# Altium PCB ASSD_TP1.PcbDoc
Units mm, origin at the board's own origin, x right, y up, seen from the top; angles counter-clockwise.
Board outline 100 x 100 mm, 6 copper layers (Top Layer, GND-TOP, VCC+, VCC-, GND-BOT, Bottom Layer), stack 1.231 mm thick; 115 components, 76 nets, 320 pads, 61 vias.
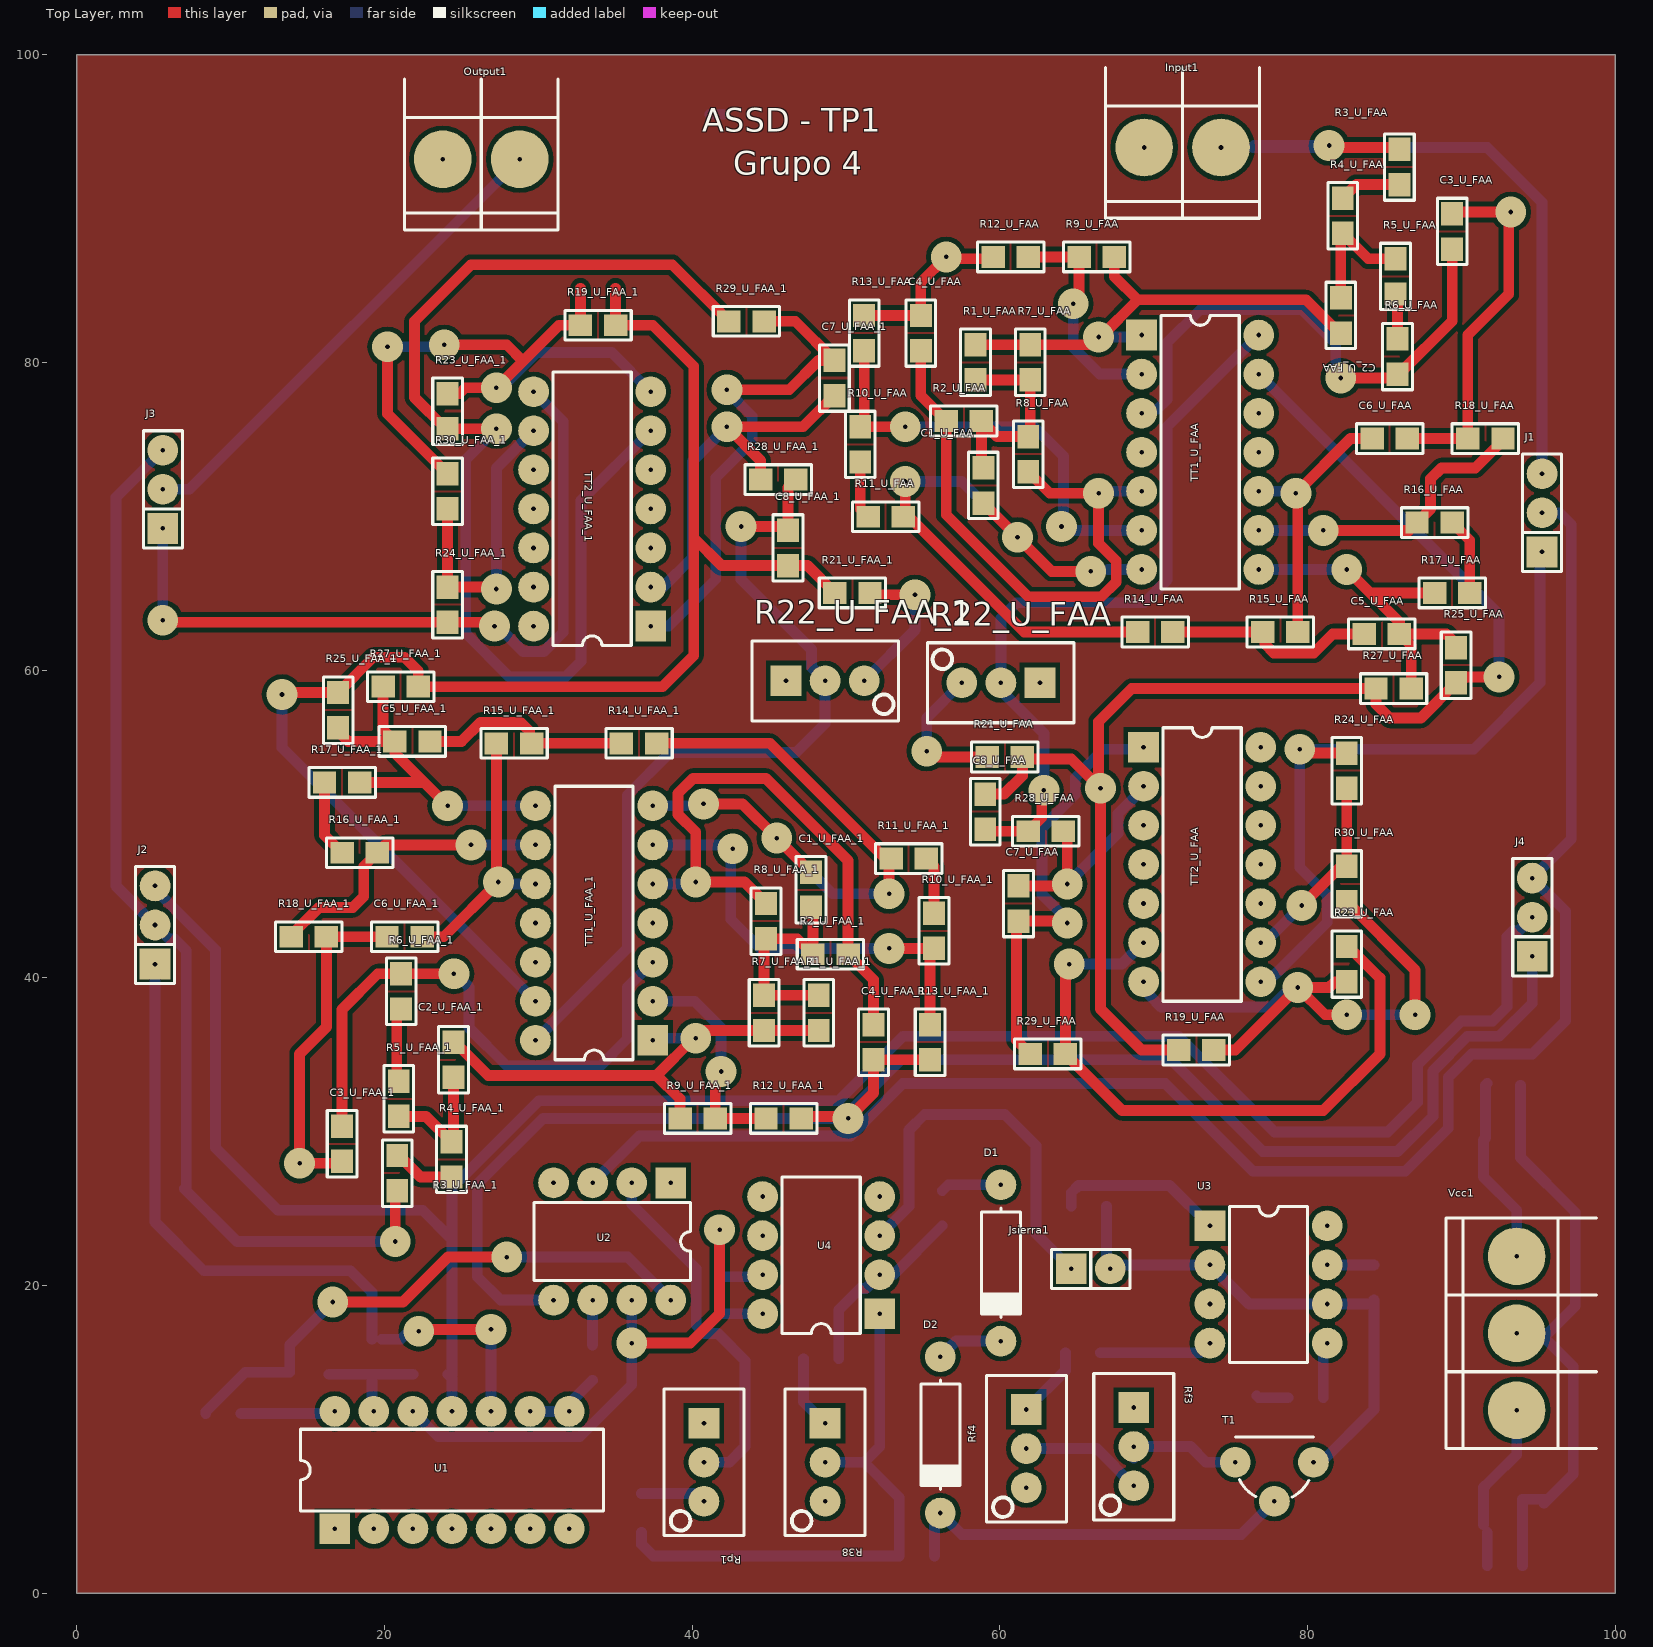
[diagram p0: Top Layer view]
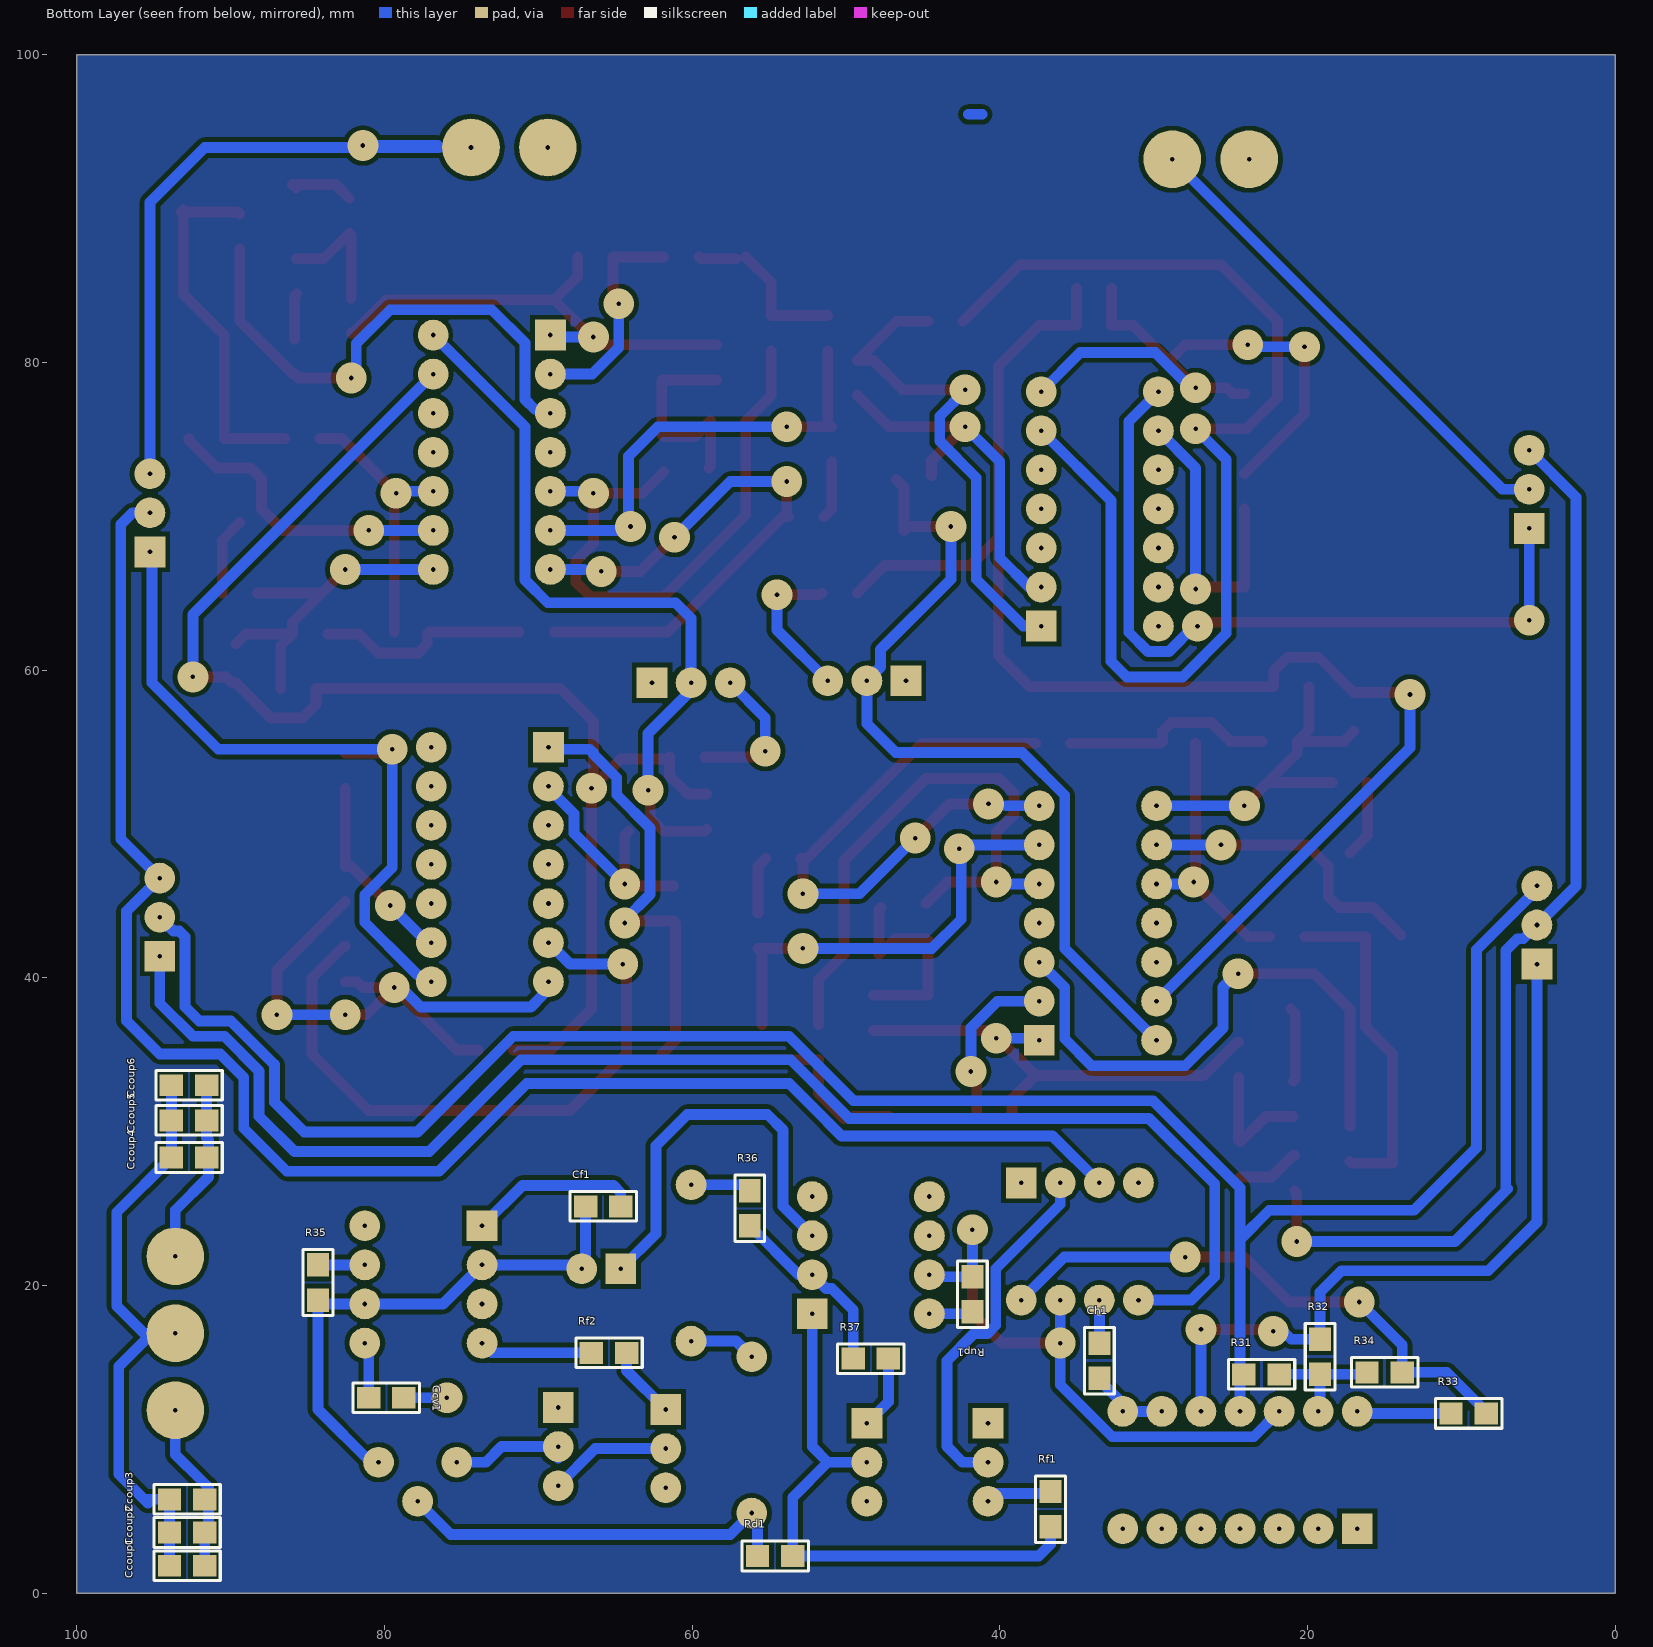
[diagram p1: Bottom Layer view, seen from below]
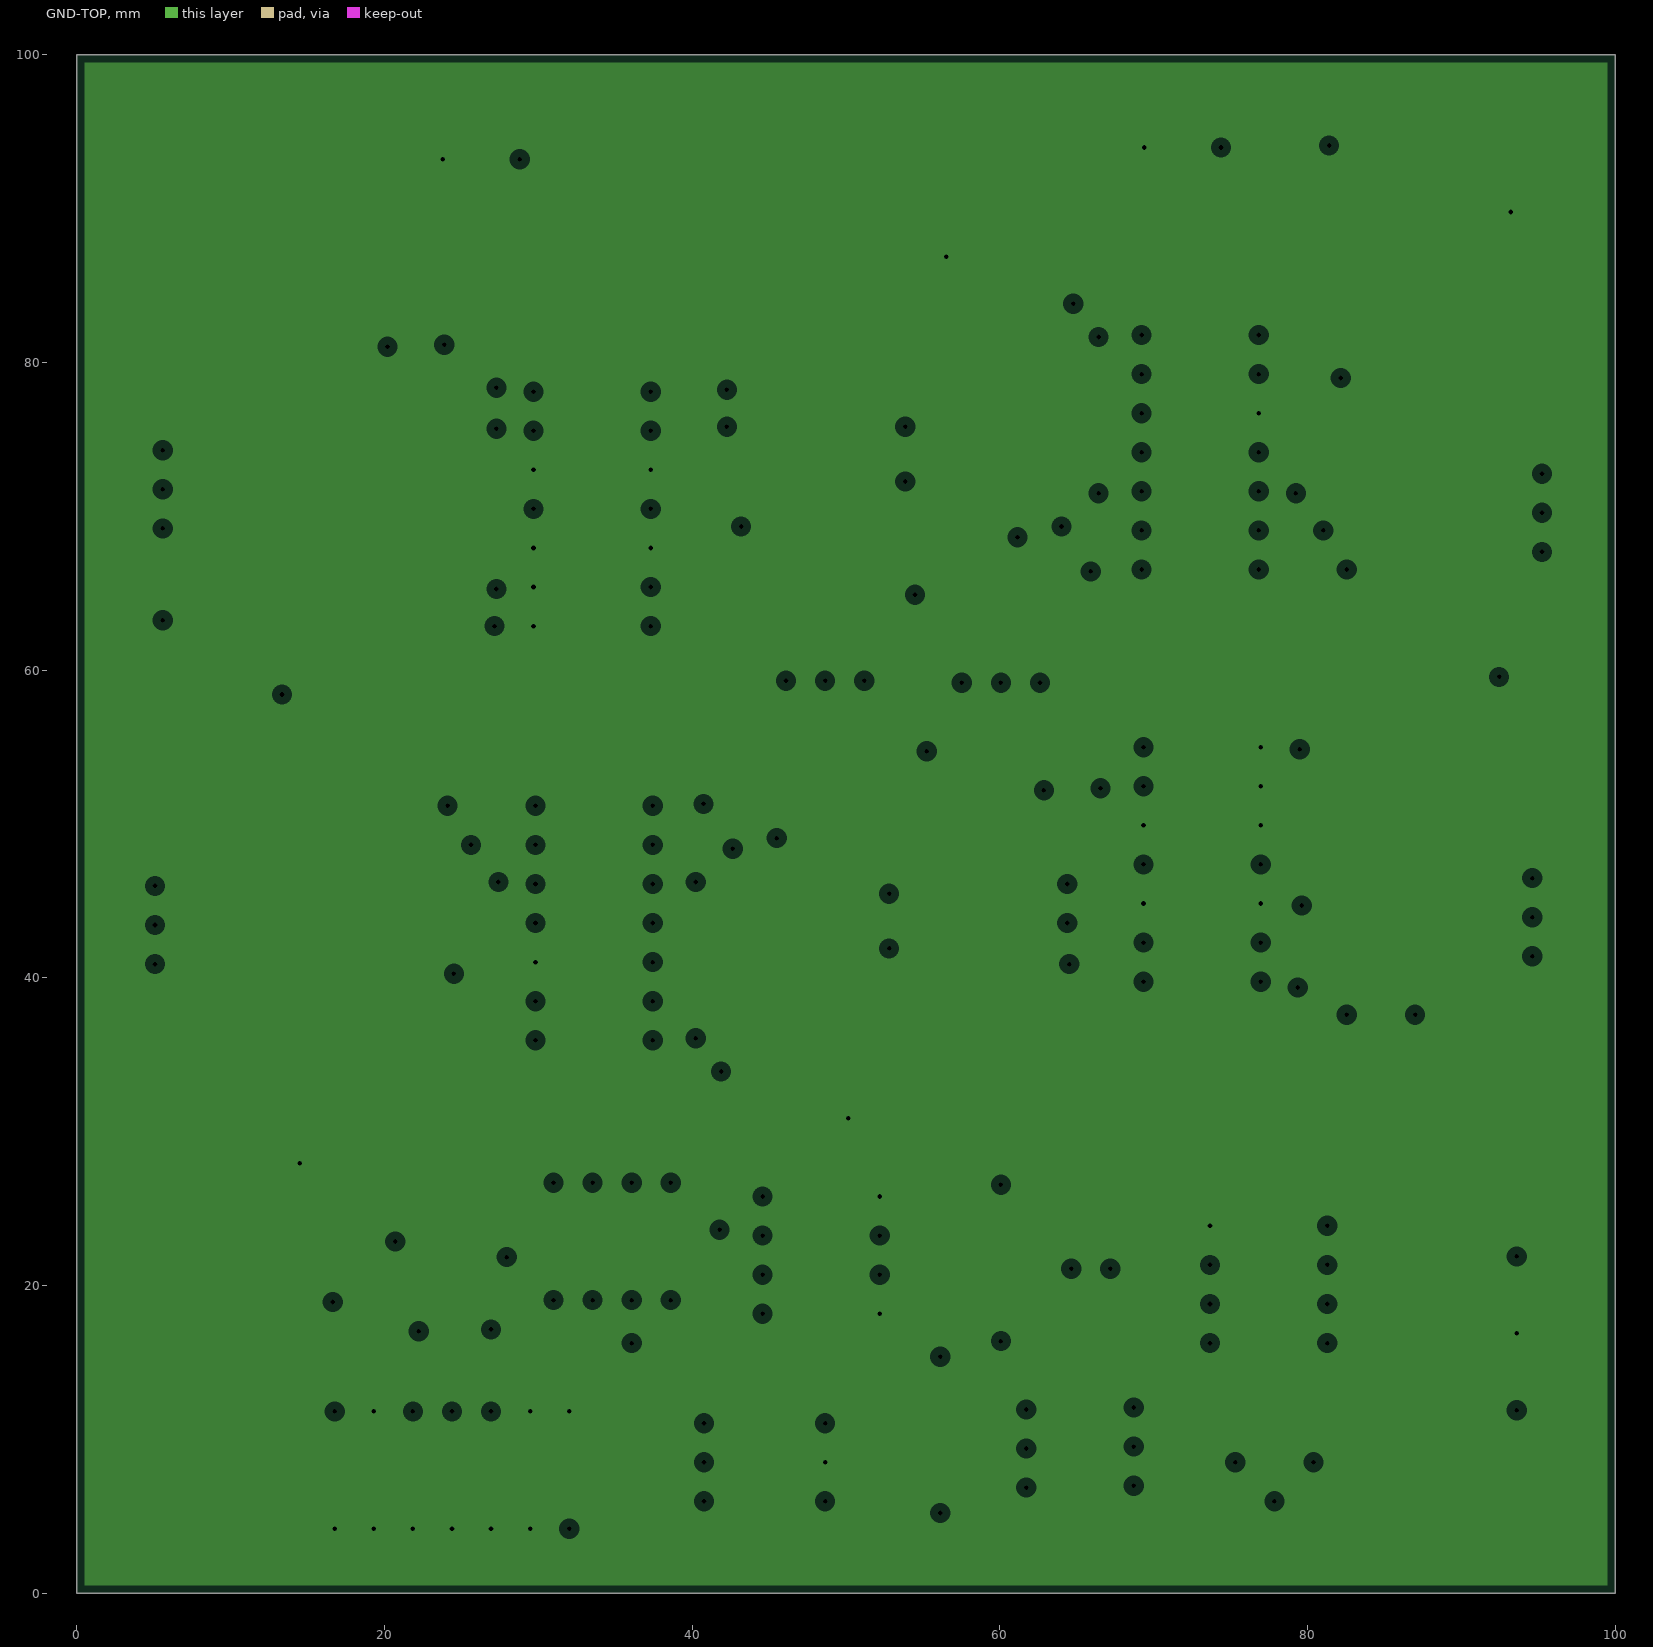
[diagram p2: GND-TOP, clearances drawn from the general rule]
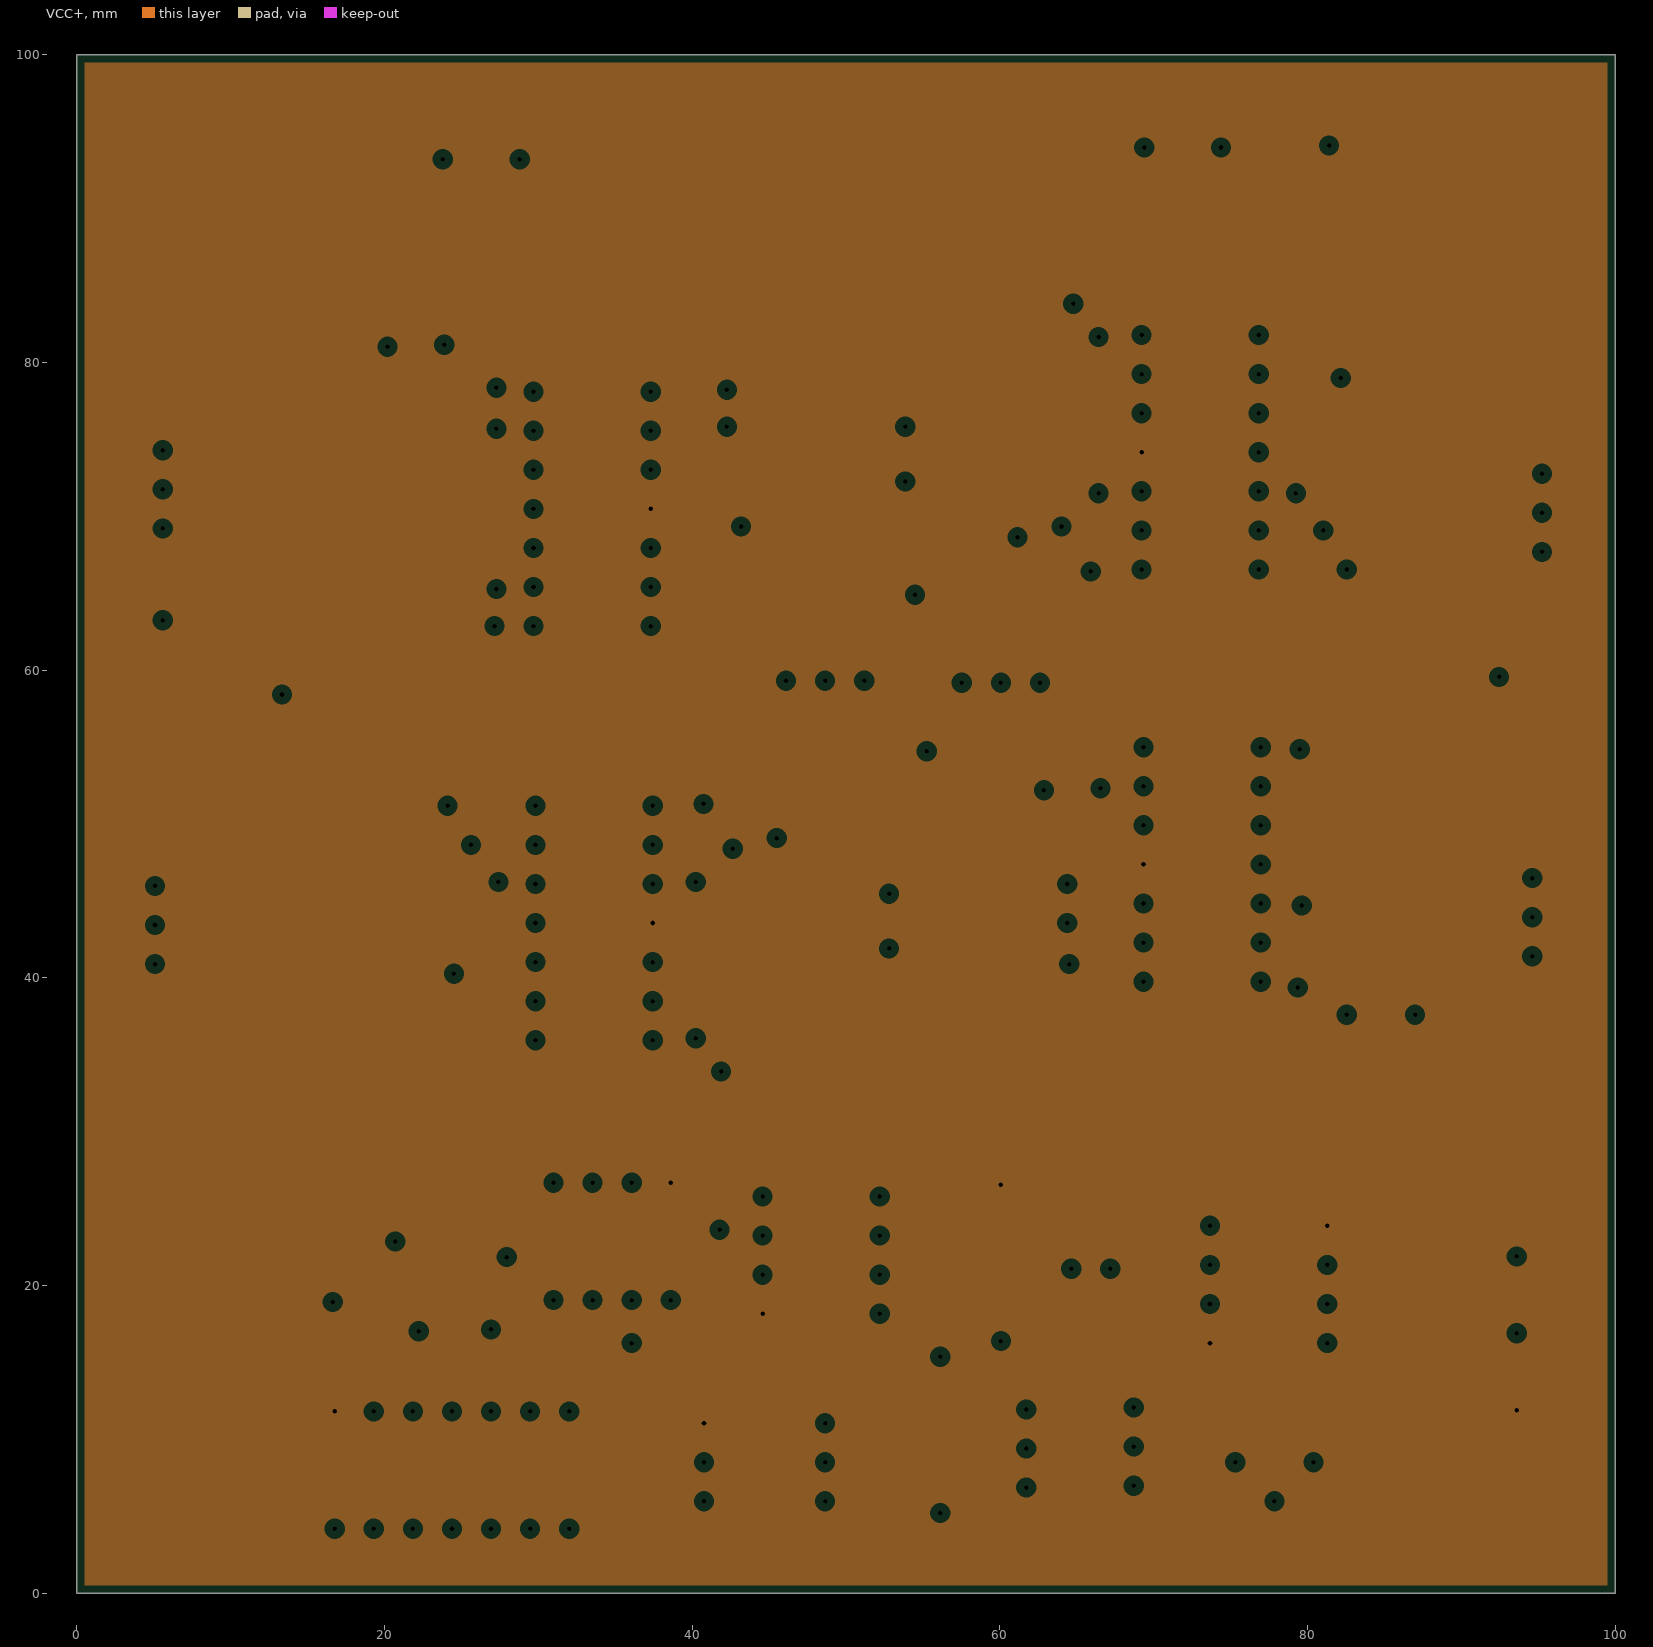
[diagram p3: VCC+, clearances drawn from the general rule]
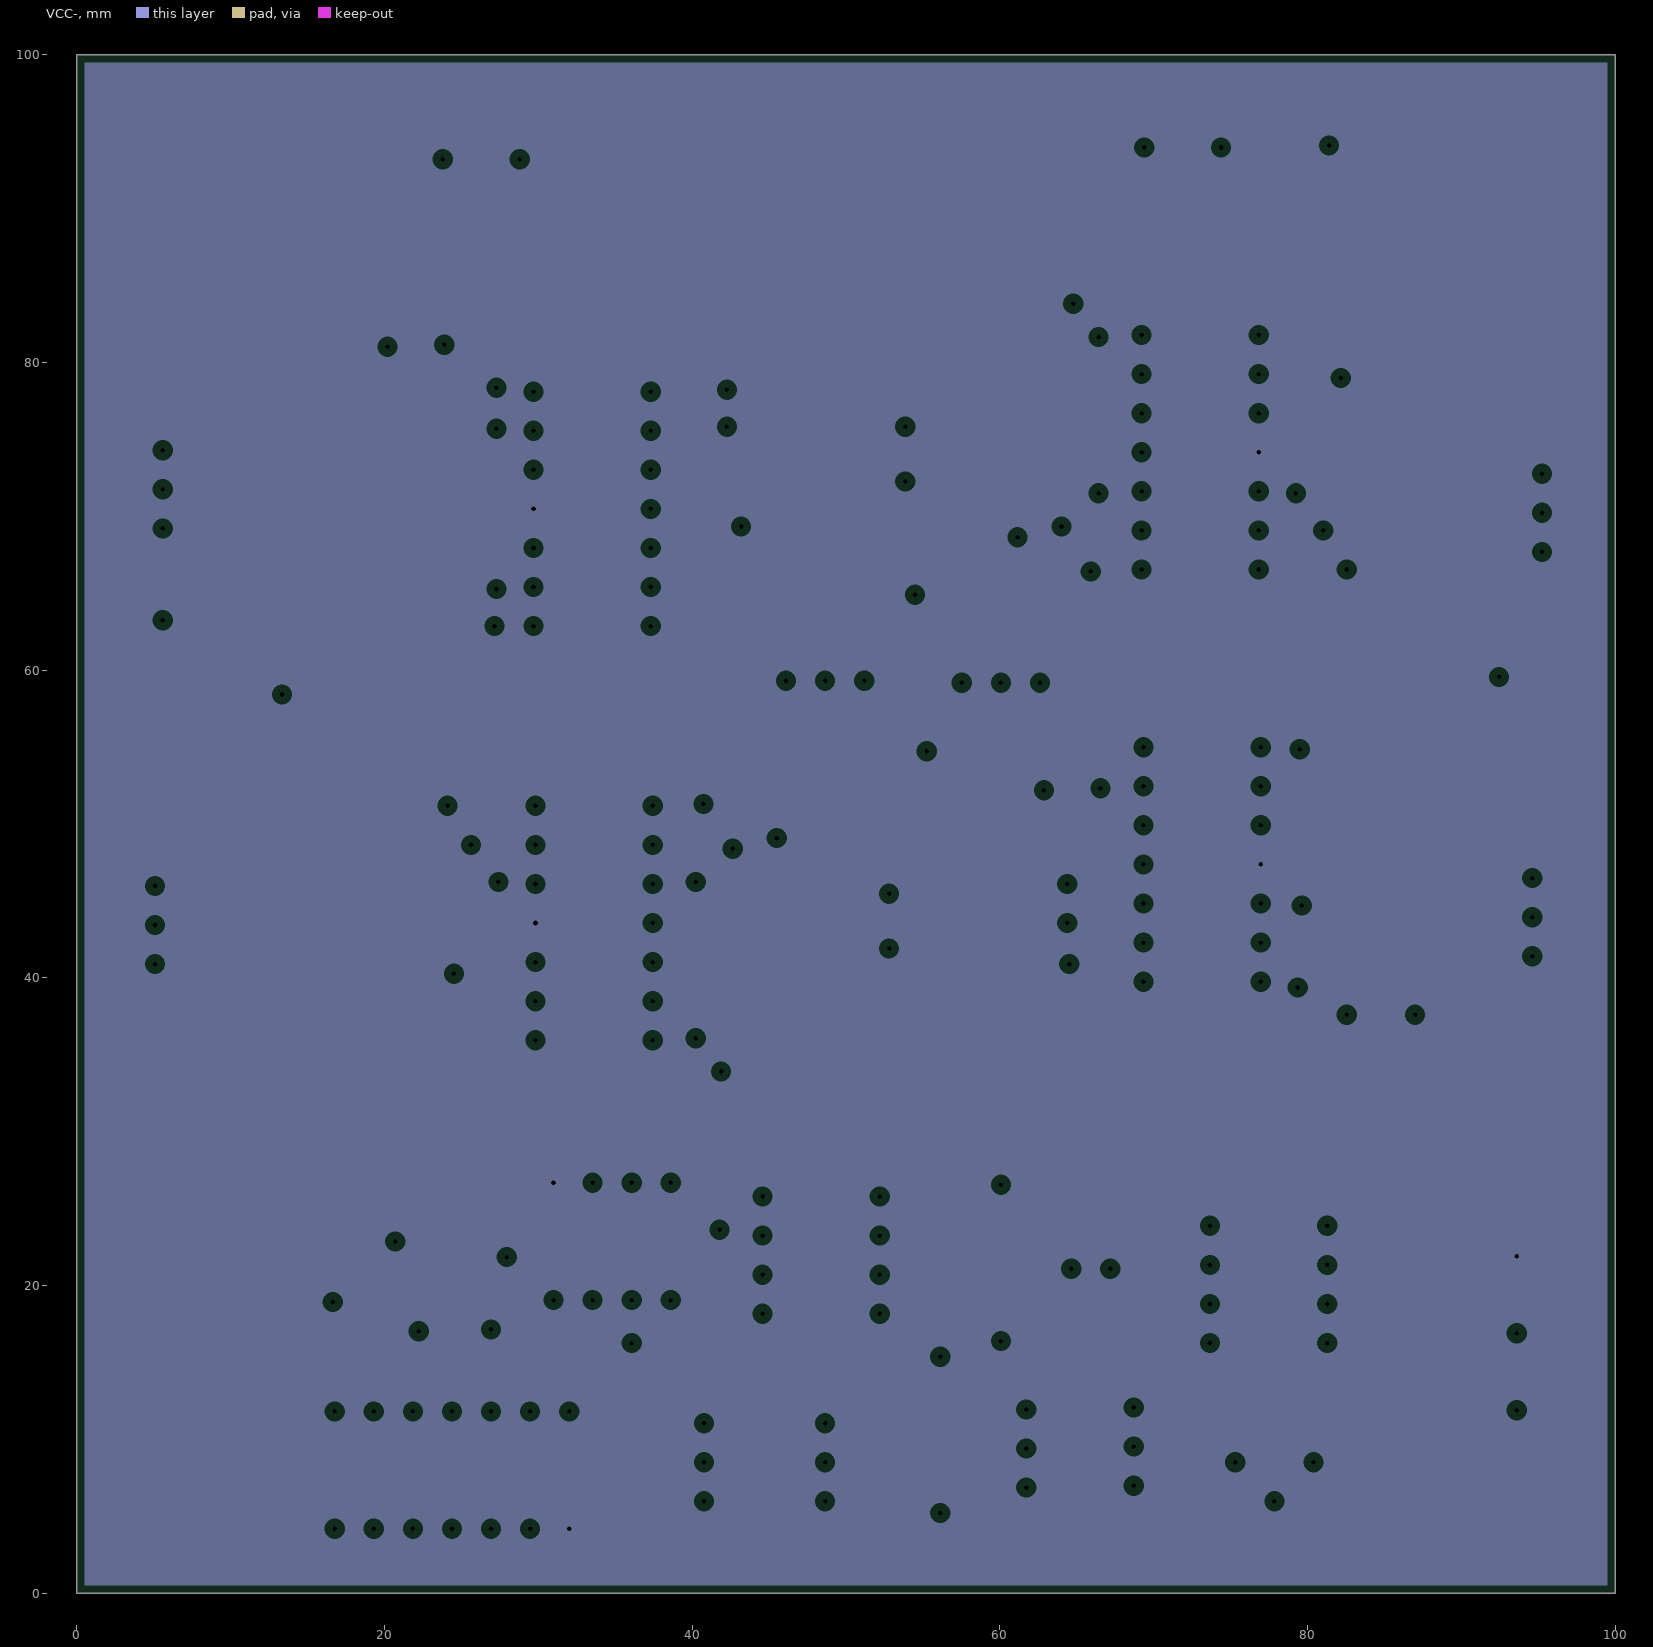
[diagram p4: VCC-, clearances drawn from the general rule]
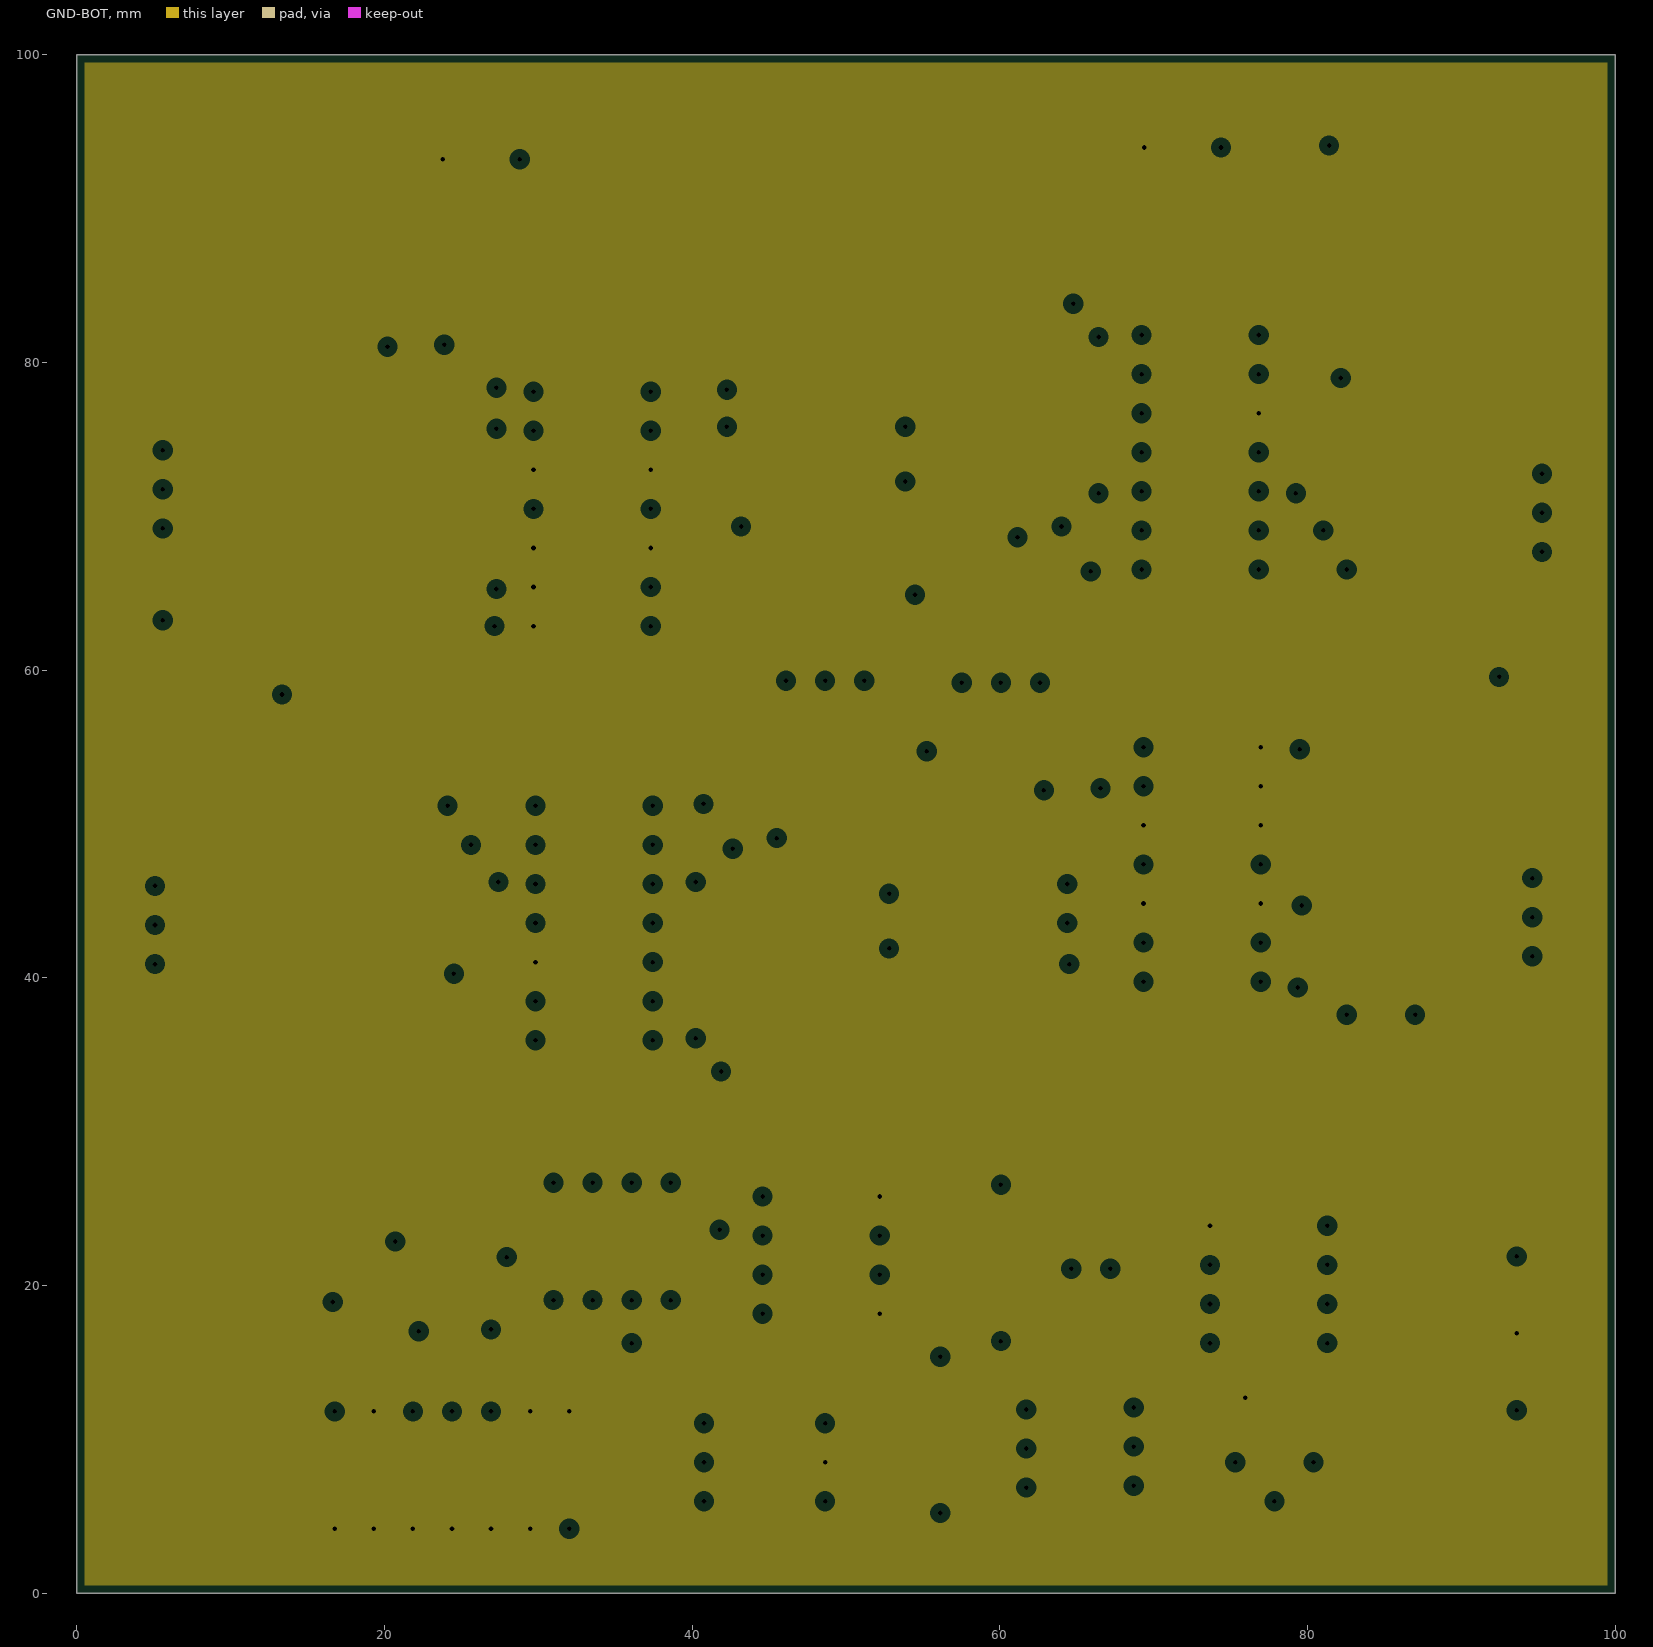
[diagram p5: GND-BOT, clearances drawn from the general rule]
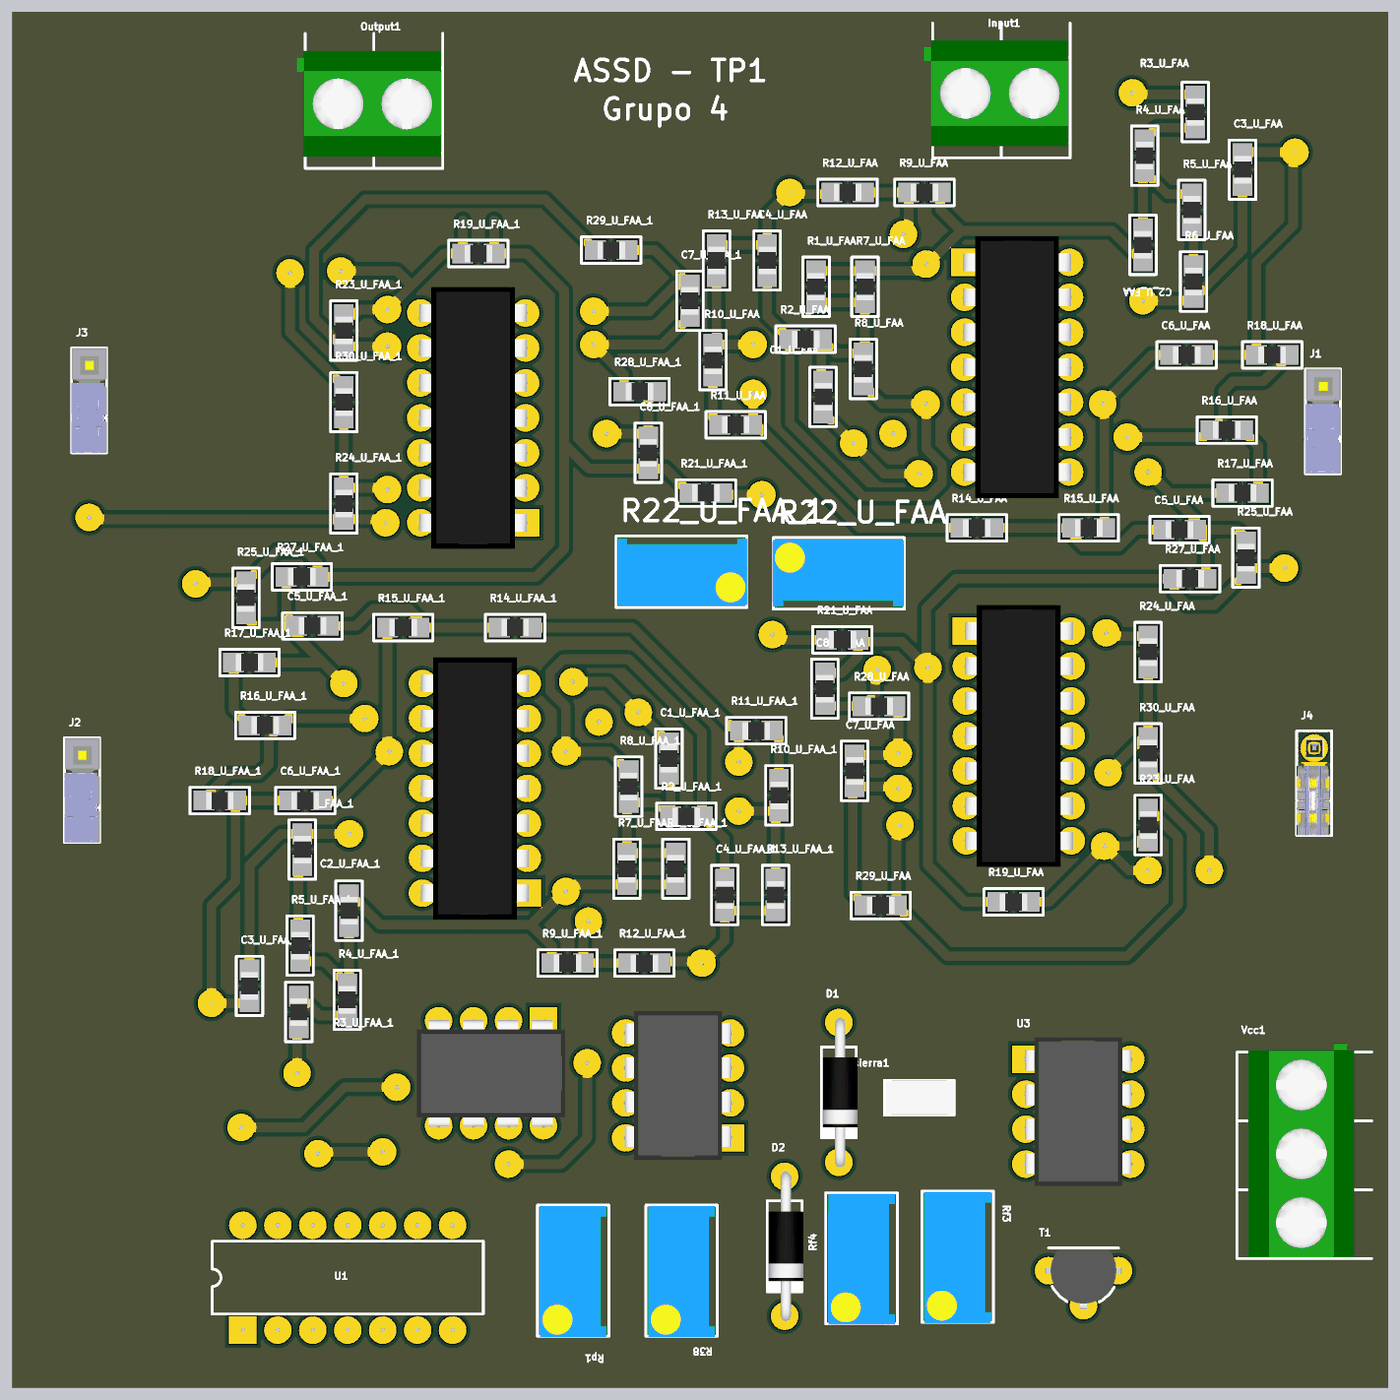
[diagram p6: 3D render of the assembled board from above, using the file's embedded part models]
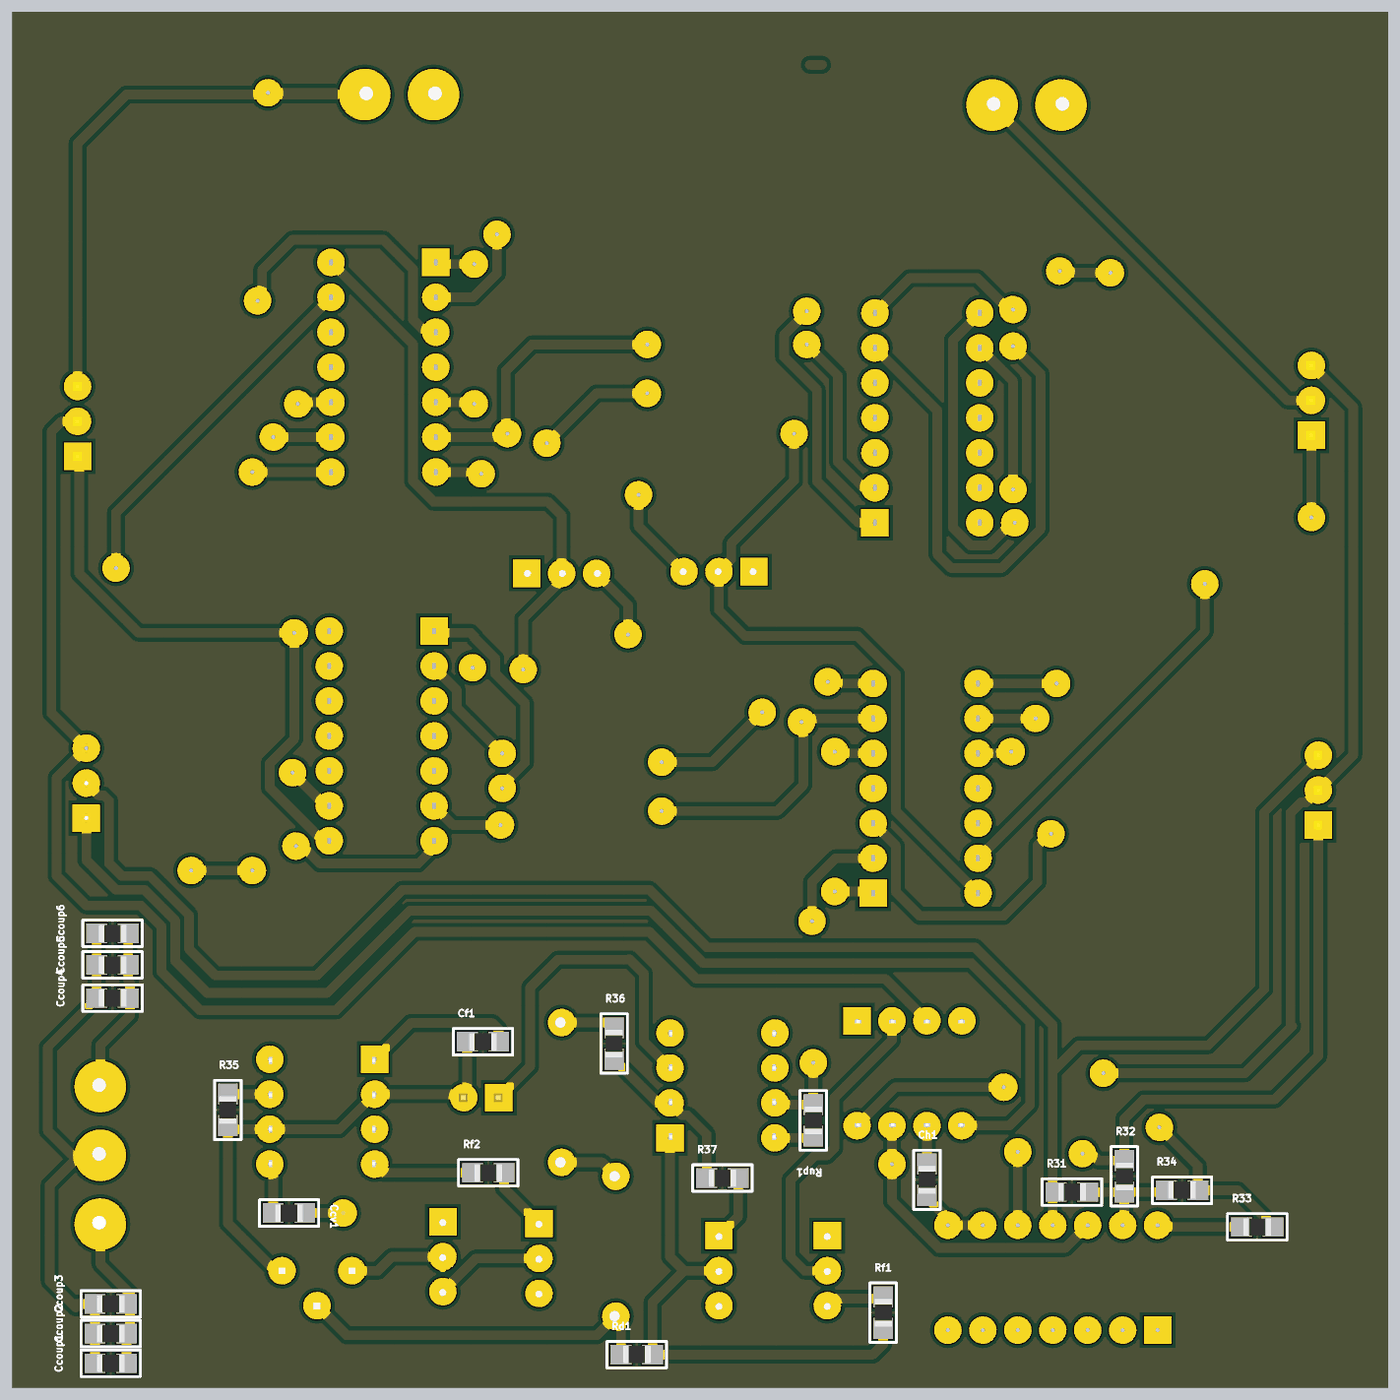
[diagram p7: 3D render of the assembled board from below, using the file's embedded part models]

## Layer stack, top to bottom
Top Solder: solder mask 0.0102, Solder Resist, Dk 3.5
Top Layer: signal copper 0.0356
Dielectric 1: core 0.254, FR-4, Dk 4.2
GND-TOP: plane copper 0.036, net GND
Dielectric 3: prepreg 0.127, Dk 4.2
VCC+: plane copper 0.036, net Vcc+_U_FAA
Dielectric 4: core 0.254, Dk 4.2
VCC-: plane copper 0.036, net Vcc-_U_FAA
Dielectric 5: prepreg 0.127, Dk 4.2
GND-BOT: plane copper 0.036, net GND
Dielectric 2: core 0.254, Dk 4.2
Bottom Layer: signal copper 0.0356
Bottom Solder: solder mask 0.0102, Solder Resist, Dk 3.5

## Board outline
0,0 100,0 100,100 0,100

## Design rules (kind name [scope] priority, off if disabled: settings)
Clearance [All] p1: gap=0.3 ignorepadtopadclearanceinfootprint=FALSE
PlaneClearance [All] p1: clearance=0.508
PlaneConnect [All] p1: pad.planeconnectstyle=Relief pad.reliefexpansion=0.508 pad.reliefentries=4 pad.reliefconductorwidth=0.254 pad.reliefairgap=0.254 via.planeconnectstyle=Direct via.reliefexpansion=0.508 via.reliefentries=4 via.reliefconductorwidth=0.254 via.reliefairgap=0.254
PolygonConnect [All] p1: connectstyle=Relief reliefconductorwidth=0.254 reliefentries=4 polygonreliefangle="90 Angle" airgapwidth=0.254
RoutingVias [All] p1: holewidth=0.3 width=2 viastyle="Through Hole" minholewidth=0.3 minwidth=1.5 maxholewidth=0.5 maxwidth=3
SolderMaskExpansion [All] p1: expansion=0.102
Width [All] p1: maxlimit=0.9 minlimit=0.6 preferedwidth=0.7
28 further rules are at their usual default settings.

## Classes and differential pairs
channel class LP: U_FAA U_FAA_1
component class U_S&H: Ch1 R33 R34 Rf1 Rp1 U2
component class U_Osc: Ccv1 Cf1 D1 D2 Jsierra1 R35 R36 R37 R38 Rd1 Rf2 Rf3 Rf4 Rup1 T1 U3 U4
component class U_FAA_1: C1_U_FAA_1 C2_U_FAA_1 C3_U_FAA_1 C4_U_FAA_1 C5_U_FAA_1 C6_U_FAA_1 C7_U_FAA_1 C8_U_FAA_1 R1_U_FAA_1 R2_U_FAA_1 R3_U_FAA_1 R4_U_FAA_1 R5_U_FAA_1 R6_U_FAA_1 R7_U_FAA_1 R8_U_FAA_1 R9_U_FAA_1 R10_U_FAA_1 R11_U_FAA_1 R12_U_FAA_1 R13_U_FAA_1 R14_U_FAA_1 R15_U_FAA_1 R16_U_FAA_1 R17_U_FAA_1 R18_U_FAA_1 R19_U_FAA_1 R21_U_FAA_1 R22_U_FAA_1 R23_U_FAA_1 R24_U_FAA_1 R25_U_FAA_1 R27_U_FAA_1 R28_U_FAA_1 R29_U_FAA_1 R30_U_FAA_1 TT1_U_FAA_1 TT2_U_FAA_1
component class U_FAA: C1_U_FAA C2_U_FAA C3_U_FAA C4_U_FAA C5_U_FAA C6_U_FAA C7_U_FAA C8_U_FAA R1_U_FAA R2_U_FAA R3_U_FAA R4_U_FAA R5_U_FAA R6_U_FAA R7_U_FAA R8_U_FAA R9_U_FAA R10_U_FAA R11_U_FAA R12_U_FAA R13_U_FAA R14_U_FAA R15_U_FAA R16_U_FAA R17_U_FAA R18_U_FAA R19_U_FAA R21_U_FAA R22_U_FAA R23_U_FAA R24_U_FAA R25_U_FAA R27_U_FAA R28_U_FAA R29_U_FAA R30_U_FAA TT1_U_FAA TT2_U_FAA
component class U_ASwitch: R31 R32 U1
component class AllInOne: Ccoup1 Ccoup2 Ccoup3 Ccoup4 Ccoup5 Ccoup6 Input1 J1 J2 J3 J4 Output1 Vcc1

## Components (designator, comment, footprint, x,y, rotation, side; value= is the part's Value field where it differs from the comment)
C1_U_FAA "CAP" 0805 58.928,72.009 r270 top (schematic designator C1)
C1_U_FAA_1 "CAP" 0805 47.721,45.72 r90 top (schematic designator C1)
C2_U_FAA "CAP" 0805 82.169,83.058 r270 top (schematic designator C2)
C2_U_FAA_1 "CAP" 0805 24.48,34.671 r90 top (schematic designator C2)
C3_U_FAA "CAP" 0805 89.408,88.519 r270 top (schematic designator C3)
C3_U_FAA_1 "CAP" 0805 17.241,29.21 r90 top (schematic designator C3)
C4_U_FAA "CAP" 0805 54.864,81.915 r270 top (schematic designator C4)
C4_U_FAA_1 "CAP" 0805 51.785,35.814 r90 top (schematic designator C4)
C5_U_FAA "CAP" 0805 84.836,62.357 r0 top (schematic designator C5)
C5_U_FAA_1 "CAP" 0805 21.813,55.372 r180 top (schematic designator C5)
C6_U_FAA "CAP" 0805 85.344,75.057 r180 top (schematic designator C6)
C6_U_FAA_1 "CAP" 0805 21.305,42.672 r0 top (schematic designator C6)
C7_U_FAA "CAP" 0805 61.214,44.831 r270 top (schematic designator C7)
C7_U_FAA_1 "CAP" 0805 49.245,78.994 r90 top (schematic designator C7)
C8_U_FAA "CAP" 0805 59.055,50.8 r270 top (schematic designator C8)
C8_U_FAA_1 "CAP" 0805 46.228,67.945 r90 top (schematic designator C8)
Ccoup1 "CAP" 0805 92.837,1.778 r0 bottom
Ccoup2 "CAP" 0805 92.837,3.937 r0 bottom
Ccoup3 "CAP" 0805 92.837,6.096 r0 bottom
Ccoup4 "CAP" 0805 92.71,28.321 r0 bottom
Ccoup5 "CAP" 0805 92.71,30.734 r0 bottom
Ccoup6 "CAP" 0805 92.71,33.02 r0 bottom
Ccv1 "CAP" 0805 79.883,12.7 r180 bottom
Cf1 "CAP" 0805 65.786,25.146 r180 bottom
Ch1 "CAP" 0805 33.528,15.113 r270 bottom
D1 "DIODO SCHOTTKY" DO41 60.071,21.463 r270 top
D2 "DIODO SCHOTTKY" DO41 56.134,10.287 r270 top
Input1 "BORNERA 2" BORNERA2 71.882,93.98 r90 top
J1 "JUMPER" JUMPER3 95.25,70.231 r90 top
J2 "JUMPER" JUMPER3 5.08,43.434 r90 top
J3 "JUMPER" JUMPER3 5.588,71.755 r90 top
J4 "JUMPER" JUMPER3 94.615,43.942 r90 top
Jsierra1 "JUMPER" JUMPER2 65.913,21.082 r0 top
Output1 "BORNERA 2" BORNERA2 26.289,93.218 r90 top
R1_U_FAA "RES" 0805 58.42,80.01 r270 top (schematic designator R1)
R1_U_FAA_1 "RES" 0805 48.229,37.719 r90 top (schematic designator R1)
R2_U_FAA "RES" 0805 57.658,76.2 r180 top (schematic designator R2)
R2_U_FAA_1 "RES" 0805 48.991,41.529 r0 top (schematic designator R2)
R3_U_FAA "RES" 0805 85.979,92.71 r270 top (schematic designator R3)
R3_U_FAA_1 "RES" 0805 20.828,27.305 r90 top (schematic designator R3)
R4_U_FAA "RES" 0805 82.296,89.535 r270 top (schematic designator R4)
R4_U_FAA_1 "RES" 0805 24.353,28.194 r90 top (schematic designator R4)
R5_U_FAA "RES" 0805 85.725,85.598 r270 top (schematic designator R5)
R5_U_FAA_1 "RES" 0805 20.924,32.131 r90 top (schematic designator R5)
R6_U_FAA "RES" 0805 85.852,80.391 r270 top (schematic designator R6)
R6_U_FAA_1 "RES" 0805 21.082,39.116 r90 top (schematic designator R6)
R7_U_FAA "RES" 0805 61.976,80.01 r270 top (schematic designator R7)
R7_U_FAA_1 "RES" 0805 44.673,37.719 r90 top (schematic designator R7)
R8_U_FAA "RES" 0805 61.849,74.041 r270 top (schematic designator R8)
R8_U_FAA_1 "RES" 0805 44.8,43.688 r90 top (schematic designator R8)
R9_U_FAA "RES" 0805 66.294,86.868 r180 top (schematic designator R9)
R9_U_FAA_1 "RES" 0805 40.355,30.861 r0 top (schematic designator R9)
R10_U_FAA "RES" 0805 50.927,74.676 r90 top (schematic designator R10)
R10_U_FAA_1 "RES" 0805 55.722,43.053 r270 top (schematic designator R10)
R11_U_FAA "RES" 0805 52.578,69.977 r0 top (schematic designator R11)
R11_U_FAA_1 "RES" 0805 54.071,47.752 r180 top (schematic designator R11)
R12_U_FAA "RES" 0805 60.706,86.868 r0 top (schematic designator R12)
R12_U_FAA_1 "RES" 0805 45.943,30.861 r180 top (schematic designator R12)
R13_U_FAA "RES" 0805 51.181,81.915 r270 top (schematic designator R13)
R13_U_FAA_1 "RES" 0805 55.468,35.814 r90 top (schematic designator R13)
R14_U_FAA "RES" 0805 70.104,62.484 r0 top (schematic designator R14)
R14_U_FAA_1 "RES" 0805 36.545,55.245 r180 top (schematic designator R14)
R15_U_FAA "RES" 0805 78.232,62.484 r0 top (schematic designator R15)
R15_U_FAA_1 "RES" 0805 28.417,55.245 r180 top (schematic designator R15)
R16_U_FAA "RES" 0805 88.265,69.596 r180 top (schematic designator R16)
R16_U_FAA_1 "RES" 0805 18.384,48.133 r0 top (schematic designator R16)
R17_U_FAA "RES" 0805 89.408,65.024 r0 top (schematic designator R17)
R17_U_FAA_1 "RES" 0805 17.241,52.705 r180 top (schematic designator R17)
R18_U_FAA "RES" 0805 91.567,75.057 r0 top (schematic designator R18)
R18_U_FAA_1 "RES" 0805 15.082,42.672 r180 top (schematic designator R18)
R19_U_FAA "RES" 0805 72.771,35.306 r0 top (schematic designator R19)
R19_U_FAA_1 "RES" 0805 33.878,82.423 r180 top (schematic designator R19)
R21_U_FAA "RES" 0805 60.325,54.356 r180 top (schematic designator R21)
R21_U_FAA_1 "RES" 0805 50.419,65.024 r0 top (schematic designator R21)
R22_U_FAA "PRESET" "PRESET V" 60.071,59.182 r180 top (schematic designator R22)
R22_U_FAA_1 "PRESET" "PRESET V" 48.641,59.309 r0 top (schematic designator R22)
R23_U_FAA "RES" 0805 82.55,40.894 r270 top (schematic designator R23)
R23_U_FAA_1 "RES" 0805 24.099,76.835 r90 top (schematic designator R23)
R24_U_FAA "RES" 0805 82.55,53.467 r90 top (schematic designator R24)
R24_U_FAA_1 "RES" 0805 24.099,64.262 r270 top (schematic designator R24)
R25_U_FAA "RES" 0805 89.662,60.325 r270 top (schematic designator R25)
R25_U_FAA_1 "RES" 0805 16.987,57.404 r90 top (schematic designator R25)
R27_U_FAA "RES" 0805 85.598,58.801 r180 top (schematic designator R27)
R27_U_FAA_1 "RES" 0805 21.051,58.928 r0 top (schematic designator R27)
R28_U_FAA "RES" 0805 62.992,49.53 r0 top (schematic designator R28)
R28_U_FAA_1 "RES" 0805 45.593,72.39 r180 top (schematic designator R28)
R29_U_FAA "RES" 0805 63.119,35.052 r0 top (schematic designator R29)
R29_U_FAA_1 "RES" 0805 43.53,82.677 r180 top (schematic designator R29)
R30_U_FAA "RES" 0805 82.55,46.101 r90 top (schematic designator R30)
R30_U_FAA_1 "RES" 0805 24.099,71.628 r270 top (schematic designator R30)
R31 "RES" 0805 22.987,14.224 r0 bottom
R32 "RES" 0805 19.177,15.367 r90 bottom
R33 "RES" 0805 9.525,11.684 r0 bottom
R34 "RES" 0805 14.986,14.351 r180 bottom
R35 "RES" 0805 84.328,20.193 r90 bottom
R36 "RES" 0805 56.261,25.019 r90 bottom
R37 "RES" 0805 48.387,15.24 r180 bottom
R38 "PRESET" "PRESET V" 48.641,8.509 r270 top
Rd1 "RES" 0805 54.61,2.413 r0 bottom
Rf1 "RES" 0805 36.703,5.461 r90 bottom
Rf2 "RES" 0805 65.405,15.621 r0 bottom
Rf3 "PRESET" "PRESET V" 68.707,9.525 r270 top
Rf4 "PRESET" "PRESET V" 61.722,9.398 r270 top
Rp1 "PRESET" "PRESET V" 40.767,8.509 r270 top
Rup1 "RES" 0805 41.783,19.431 r270 bottom
T1 "TRANSISTOR PNP" TO92 77.851,7.239 r0 top
TT1_U_FAA "TL084ACN" DIP14 69.215,81.788 r0 top (schematic designator TT1)
TT1_U_FAA_1 "TL084ACN" DIP14 37.434,35.941 r180 top (schematic designator TT1)
TT2_U_FAA "TL084ACN" DIP14 69.342,54.991 r0 top (schematic designator TT2)
TT2_U_FAA_1 "TL084ACN" DIP14 37.307,62.865 r180 top (schematic designator TT2)
U1 "TLC4066IN" N014 24.384,8.001 r0 top
U2 "LF398" DIP8 38.608,26.67 r270 top
U3 "LM555" DIP8 73.66,23.876 r0 top
U4 "LM311" DIP8 52.197,18.161 r180 top
Vcc1 "BORNERA 3" BORNERA3 93.599,16.891 r0 top

## Footprints (in the part's own frame and the unit in brackets; to place one, negate y for a bottom-side part, rotate by r counter-clockwise, add the part's x,y. Pads: shape width x height; smd on the part's side, far side on the other; paste and mask are expansions set on the pad)
0805 [mil] "Pasivo 0805"
  rect 60x56 smd: 1(-45,0) 2(45,0)
  silkscreen extent -85,-38 85,38, body extent -40,-25 39,25, height 15
BORNERA2 [mm] "Bornera con Tornillos 5mm separación"
  round 3.75 hole 0.3: 1(0,2.5) 2(0,-2.5)
  silkscreen extent -4.6,-5 5.2,5, body extent -3.76,-4.89 3.94,5.61, height 10
BORNERA3 [mm] "Bornera con Tornillos 5mm separación"
  round 3.75 hole 0.3: 1(0,5) 2(0,0) 3(0,-5)
  silkscreen extent -4.6,-7.5 5.2,7.5, body extent -3.76,-7.39 3.94,8.11, height 10.05
DIP8 [mm]
  rect 2x2 hole 0.3: 1(0,0)
  round 2 hole 0.3: 2(0,-2.54) 3(0,-5.08) 4(0,-7.62) 5(7.62,-7.62) 6(7.62,-5.08) 7(7.62,-2.54) 8(7.62,0)
  silkscreen extent 1.27,-8.89 6.35,1.27, body extent -0.06,-9.21 7.7,1.59, height 4.5
DIP14 [mm]
  rect 2x2 hole 0.3: 1(0,0)
  round 2 hole 0.3: 2(0,-2.54) 3(0,-5.08) 4(0,-7.62) 5(0,-10.16) 6(0,-12.7) 7(0,-15.24) 8(7.62,-15.24) 9(7.62,-12.7) 10(7.62,-10.16) 11(7.62,-7.62) 12(7.62,-5.08) 13(7.62,-2.54) 14(7.62,0)
  silkscreen extent 1.27,-16.51 6.35,1.27, body extent -0.13,-17.14 7.75,1.9, height 4.19
DO41 [mm]
  round 2 hole 0.3: 1(-5.08,0) 2(5.08,0)
  silkscreen extent -3.56,-1.27 3.56,1.27, body extent -5.46,-1.19 5.46,1.37, height 2.03
JUMPER2 [mm]
  rect 2x2 hole 0.3: 1(-1.27,0)
  round 2 hole 0.3: 2(1.27,0)
  silkscreen extent -2.54,-1.27 2.54,1.27, body extent -2.46,-1.27 2.54,1.27, height 9.5
JUMPER3 [mm]
  rect 2x2 hole 0.3: 1(-2.54,0)
  round 2 hole 0.3: 2(0,0) 3(2.54,0)
  silkscreen extent -3.81,-1.27 3.81,1.27, body extent -3.81,-1.3 3.81,1.27, height 16.15
N014 [mm] "DIP; 14 Leads; Row Spacing 7.62 mm; Pitch 2.54 mm"
  rect 2x2 hole 0.3: 1(-7.62,-3.81)
  round 2 hole 0.3: 2(-5.08,-3.81) 3(-2.54,-3.81) 4(0,-3.81) 5(2.54,-3.81) 6(5.08,-3.81) 7(7.62,-3.81) 8(7.62,3.81) 9(5.08,3.81) 10(2.54,3.81) 11(0,3.81) 12(-2.54,3.81) 13(-5.08,3.81) 14(-7.62,3.81)
  silkscreen extent -9.85,-2.65 9.85,2.65, body extent -9.59,-3.3 9.59,3.3, height 5.08
"PRESET V" [mm]
  rect 2x2 hole 0.3: 1(-2.54,0)
  round 2 hole 0.3: 2(0,0) 3(2.54,0)
  silkscreen extent -4.76,-2.6 4.76,2.6, body extent -4.7,-2.42 4.83,2.42, height 11.55
TO92 [mm]
  round 2 hole 0.3: 1(0,-1.27) 2(2.54,1.27) 3(-2.54,1.27)
  silkscreen extent -2.54,-1 2.54,2.92, body extent -2.79,-1.55 2.79,2.79, height 8

## Part data
J1 J2 J3 J4: library part JUMPER3
TT1_U_FAA TT1_U_FAA_1 TT2_U_FAA TT2_U_FAA_1: "General-Purpose J-FET Quad Operational Amplifier", ComponentLink1Description="Manufacturer Link", ComponentLink1URL=http://www.st.com/, ComponentLink2Description=Datasheet, ComponentLink2URL=http://www.st.com/stonline/products/literature/ds/2301/tl084.pdf, DatasheetVersion=Jan-1999, LatestRevisionDate=06-Jun-2005, LatestRevisionNote="Stylized 3D Model Added.", PackageDescription="DIP; 14 Leads; Row Spacing 7.62 mm; Pitch 2.54 mm", PackageReference=DIP14, PackageVersion=Jan-1997, Published=24-Aug-2001, Publisher="Altium Limited"
U1: "Quadruple Bilateral Analog Switch", ComponentLink1Description="Manufacturer Link", ComponentLink1URL=http://www.ti.com/, DatasheetVersion=Jan-1986, LatestRevisionDate=04-Mar-2005, LatestRevisionNote="Stylized 3D Model Added.", PackageDescription="DIP; 14 Leads; Row Spacing 7.62 mm; Pitch 2.54 mm", PackageReference=N014, PackageVersion=Oct-1995, Published=8-Jun-2000, Publisher="Altium Limited"
U2 U4: library part IC_DIP8
U3: "Timer"

## Via types
v1: diameter 2, hole 0.3, Top Layer to Bottom Layer, 56 vias
v2: diameter 2, hole 0.3, Top Layer to GND-TOP, 4 vias
v3: diameter 2, hole 0.3, GND-BOT to Bottom Layer, 1 vias

## Nets (pads, with @x,y where several pads share a name; then routed paths per layer and width w, separated by ;. In a path a pad name is that pad's centre, name@x,y a point inside that pad or via, vN(x,y) a via of type N, cw(c..) or ccw(c..) an arc to the next point about the centre after c; other vN are vias at no path point)
Clk1: Rup1.1 U1.12 U2.7 U4.7 | length 39.5
  Top Layer w0.7: v1(36.068,16.256) 39.878,16.256 41.783,18.161 v1(41.783,23.622)
  Bottom Layer w0.7: U1.12 23.495,10.16 32.686,10.16 36.068,13.542 v1(36.068,16.256) ; v1@36.068,16.51 U2.7 ; v1@41.783,23.749 v1(41.783,23.622) Rup1.1 44.45,20.574 U4.7
GND: C3_U_FAA.1 C3_U_FAA_1.1 C4_U_FAA.1 C4_U_FAA_1.1 C6_U_FAA.1 C6_U_FAA_1.1 Ccoup1.2 Ccoup2.2 Ccoup3.2 Ccoup4.2 Ccoup5.2 Ccoup6.2 Ccv1.2 Cf1.2 Ch1.2 Input1.1 Output1.1 R12_U_FAA.1 R12_U_FAA_1.1 R13_U_FAA.1 R13_U_FAA_1.1 R18_U_FAA.1 R18_U_FAA_1.1 R31.1 R32.1 R34.1 R38.2 Rd1.1 Rf1.1 TT1_U_FAA.12 TT1_U_FAA_1.12 TT2_U_FAA.3 TT2_U_FAA.5 TT2_U_FAA.10 TT2_U_FAA.12 TT2_U_FAA.13 TT2_U_FAA.14 TT2_U_FAA_1.3 TT2_U_FAA_1.5 TT2_U_FAA_1.10 TT2_U_FAA_1.12 TT2_U_FAA_1.13 TT2_U_FAA_1.14 U1.1 U1.2 U1.3 U1.4 U1.5 U1.6 U1.8 U1.9 U1.13 U3.1 U4.1 U4.4 Vcc1.2 | length 171.1
  Top Layer w0.7: C3_U_FAA_1.1 17.114,27.94 v2(14.478,27.94) 14.478,35.052 16.225,36.799 R18_U_FAA_1.1 C6_U_FAA_1.1 ; R12_U_FAA_1.1 47.213,30.988 v2@49.499,30.988 ; v2(50.134,30.861) 51.785,32.512 C4_U_FAA_1.1 R13_U_FAA_1.1 ; R13_U_FAA.1 C4_U_FAA.1 54.864,85.217 v2(56.515,86.868) ; v2@57.15,86.741 59.436,86.741 R12_U_FAA.1 ; C6_U_FAA.1 R18_U_FAA.1 90.424,81.788 93.091,84.455 v2@93.091,89.789 ; C3_U_FAA.1 89.535,89.789 v2@93.091,89.789 ; v2@93.091,89.789 93.091,89.916 v2(93.218,89.789) v2@93.091,89.789
  Bottom Layer w0.7: R34.1@16.383,14.224 R32.1 ; U1.13 19.177,11.938 R32.1 ; R31.1 R32.1 ; U1.9 U1.8 32.004,12.319 Ch1.2@33.528,13.843 ; Rf1.1@36.703,3.937 36.703,3.175 37.465,2.413 Rd1.1 53.467,6.223 51.181,8.509 ; R38.2@48.258,8.892 R38.2 51.181,8.509 ; U4.1 52.197,9.525 51.181,8.509 ; Cf1.2 64.643,26.035 65.115,26.507 71.029,26.507 U3.1 ; Input1.1@69.128,94.234 Input1.1 ; v3@76.708,12.827 76.835,12.7 Ccv1.2 ; Vcc1.2 Vcc1.2@95.123,16.891 ; Ccoup6.2 Ccoup5.2 Ccoup4.2 97.409,24.765 97.409,18.669 95.631,16.891 Vcc1.2@95.123,16.891 ; Ccoup1.2 Ccoup2.2 Ccoup3.2 95.377,6.096 ; 95.377,5.842 97.282,7.747 97.282,14.732 Vcc1.2@95.123,16.891
  other v3: 75.946,12.7
Input1: J1.2 J4.3 U2.3 | length 110.7
  Bottom Layer w0.7: U2.3 36.576,29.718 50.292,29.718 51.197,30.623 51.197,30.64 53.688,33.131 70.755,33.131 76.454,27.432 86.36,27.432 89.154,30.226 89.154,33.528 90.678,35.052 94.615,35.052 96.774,37.211 96.774,44.323 J4.3 97.155,49.022 97.155,69.469 96.393,70.231 J1.2
Input2: J2.3 J4.2 R31.2 U1.11 | length 138.2
  Bottom Layer w0.7: J2.3 4.873,45.974 9.017,41.83 9.017,28.956 13.081,24.892 22.479,24.892 24.384,22.987 ; R31.2 24.384,13.97 U1.11 ; R31.2@24.384,14.224 24.384,22.987 ; J4.2 93.725,43.052 93.346,43.052 92.964,42.67 92.964,38.117 92.042,37.195 89.993,37.195 87.154,34.356 87.154,31.909 85.217,29.972 77.851,29.972 71.628,36.195 53.704,36.195 49.513,32.004 30.034,32.004 24.384,26.354 24.384,22.987
NetC1_U_FAA_1: C1_U_FAA.1 R1_U_FAA.2 R2_U_FAA.1 R7_U_FAA.2 R8_U_FAA.1 | length 13.9
  Top Layer w0.7: R1_U_FAA.2 R7_U_FAA.2 61.976,75.311 R8_U_FAA.1 59.817,75.184 R2_U_FAA.1 58.801,73.279 C1_U_FAA.1
NetC1_U_FAA_1_1: C1_U_FAA_1.1 R1_U_FAA_1.2 R2_U_FAA_1.1 R7_U_FAA_1.2 R8_U_FAA_1.1 | length 13.9
  Top Layer w0.7: C1_U_FAA_1.1 47.848,44.45 R2_U_FAA_1.1 46.832,42.545 R8_U_FAA_1.1 44.673,42.418 R7_U_FAA_1.2 R1_U_FAA_1.2
NetC2_U_FAA_1: C2_U_FAA.1 R4_U_FAA.2 R5_U_FAA.1 | length 8.4
  Top Layer w0.7: C2_U_FAA.1 82.169,88.265 R4_U_FAA.2 83.947,86.741 R5_U_FAA.1
NetC2_U_FAA_1_1: C2_U_FAA_1.1 R4_U_FAA_1.2 R5_U_FAA_1.1 | length 8.4
  Top Layer w0.7: R5_U_FAA_1.1 22.702,30.988 R4_U_FAA_1.2 24.48,29.464 C2_U_FAA_1.1
NetC3_U_FAA_1_2: C3_U_FAA_1.2 R6_U_FAA_1.2 TT1_U_FAA_1.3 | length 37.4
  Top Layer w0.7: C3_U_FAA_1.2 17.241,37.942 19.558,40.259 R6_U_FAA_1.2 v1(24.511,40.259)
  Bottom Layer w0.7: v1@24.638,40.259 25.497,39.4 25.497,36.733 27.939,34.291 34.037,34.291 35.784,36.038 35.784,39.371 TT1_U_FAA_1.3
NetC3_U_FAA_2: C3_U_FAA.2 R6_U_FAA.2 TT1_U_FAA.3 | length 34.2
  Top Layer w0.7: v1(82.169,78.994) 85.598,78.994 R6_U_FAA.2 85.958,79.248 89.408,82.698 C3_U_FAA.2
  Bottom Layer w0.7: TT1_U_FAA.3 69.215,76.962 70.229,76.962 70.865,77.598 70.865,81.279 73.024,83.438 79.63,83.438 81.835,81.233 v1@81.835,79.121
NetC4_U_FAA_1_2: C4_U_FAA_1.2 R2_U_FAA_1.2 R8_U_FAA_1.2 TT1_U_FAA_1.5 | length 38.8
  Top Layer w0.7: R8_U_FAA_1.2 43.403,46.228 v1(40.228,46.228) 40.228,49.483 39.086,50.625 39.086,51.991 40.053,52.958 44.801,52.958 50.134,47.625 R2_U_FAA_1.2 51.785,39.878 C4_U_FAA_1.2
  Bottom Layer w0.7: TT1_U_FAA_1.5 v1@39.847,46.101
NetC4_U_FAA_2: C4_U_FAA.2 R2_U_FAA.2 R8_U_FAA.2 TT1_U_FAA.5 | length 38.8
  Top Layer w0.7: C4_U_FAA.2 54.864,77.851 R2_U_FAA.2 56.515,70.104 61.848,64.771 66.596,64.771 67.563,65.738 67.563,67.104 66.421,68.246 v1(66.421,71.501) 63.246,71.501 R8_U_FAA.2
  Bottom Layer w0.7: v1@66.802,71.628 TT1_U_FAA.5
NetC5_U_FAA_1: C5_U_FAA.1 R14_U_FAA.2 R15_U_FAA.1 | length 13.9
  Top Layer w0.7: R14_U_FAA.2 R15_U_FAA.1 77.216,62.357 77.216,61.722 77.815,61.123 80.406,61.123 81.64,62.357 C5_U_FAA.1
NetC5_U_FAA_1_1: C5_U_FAA_1.1 R14_U_FAA_1.2 R15_U_FAA_1.1 | length 13.9
  Top Layer w0.7: C5_U_FAA_1.1 25.009,55.372 26.243,56.606 28.834,56.606 29.433,56.007 29.433,55.372 R15_U_FAA_1.1 R14_U_FAA_1.2
NetC6_U_FAA_1_2: C6_U_FAA_1.2 R15_U_FAA_1.2 TT1_U_FAA_1.10 | length 17.8
  Top Layer w0.7: C6_U_FAA_1.2 23.845,42.672 v1(27.401,46.228) 27.274,46.355 R15_U_FAA_1.2
  Bottom Layer w0.7: v1@27.528,46.101 TT1_U_FAA_1.10
NetC6_U_FAA_2: C6_U_FAA.2 R15_U_FAA.2 TT1_U_FAA.10 | length 17.8
  Top Layer w0.7: R15_U_FAA.2 79.375,71.374 v1(79.248,71.501) 82.804,75.057 C6_U_FAA.2
  Bottom Layer w0.7: TT1_U_FAA.10 v1@79.121,71.628
NetC7_U_FAA_1: C7_U_FAA.1 R28_U_FAA.2 TT2_U_FAA.2 | length 15
  Top Layer w0.7: C7_U_FAA.1 64.262,45.974 v1(64.389,46.101) 64.389,49.276 R28_U_FAA.2
  Bottom Layer w0.7: v1(64.389,46.101) 67.691,49.403 67.691,50.673 TT2_U_FAA.2@69.342,52.324
NetC7_U_FAA_1_1: C7_U_FAA_1.1 R28_U_FAA_1.2 TT2_U_FAA_1.2 | length 24.8
  Top Layer w0.7: R28_U_FAA_1.2@44.45,72.644 44.45,73.629 v1(42.26,75.819) 47.213,75.819 C7_U_FAA_1.1
  Bottom Layer w0.7: TT2_U_FAA_1.2 38.1,65.405 40.005,67.31 40.005,73.564 v1(42.26,75.819)
NetC7_U_FAA_1_2: C7_U_FAA_1.2 R29_U_FAA_1.1 TT2_U_FAA_1.1 | length 33.2
  Top Layer w0.7: v1(42.26,78.232) 46.309,78.232 48.214,80.137 C7_U_FAA_1.2 46.705,82.677 R29_U_FAA_1.1
  Bottom Layer w0.7: TT2_U_FAA_1.1 38.481,62.865 41.529,65.913 41.529,72.517 43.91,74.898 43.91,76.502 42.26,78.152 v1(42.26,78.232) 42.133,78.232 v1@42.006,78.105
NetC7_U_FAA_2: C7_U_FAA.2 R29_U_FAA.1 TT2_U_FAA.1 | length 28.6
  Top Layer w0.7: R29_U_FAA.1 61.087,35.941 61.087,43.561 C7_U_FAA.2 64.262,43.688 v1(64.389,43.561)
  Bottom Layer w0.7: v1(64.389,43.561) 64.389,43.768 62.739,45.418 62.739,49.738 64.898,51.897 64.898,53.007 66.421,54.53 66.421,54.61 66.675,54.864 TT2_U_FAA.1@69.342,54.864
NetC8_U_FAA_1: C8_U_FAA.1 R19_U_FAA.1 R21_U_FAA.1 R25_U_FAA.2 R27_U_FAA.2 TT1_U_FAA.13 | length 90.7
  Top Layer w0.7: C8_U_FAA.1 60.278,51.943 61.468,53.133 R21_U_FAA.1 61.595,54.229 64.643,54.229 v1@66.421,52.451 ; R19_U_FAA.1 69.215,35.306 66.548,37.973 v1(66.548,52.324) v1@66.421,52.451 ; v1(92.456,59.563) 90.297,59.563 89.916,59.182 R25_U_FAA.2 87.376,56.896 85.344,56.896 84.455,57.785 R27_U_FAA.2 68.58,58.801 66.421,56.642 v1@66.421,52.451
  Bottom Layer w0.7: v1@66.294,52.324 v1(66.548,52.324) ; TT1_U_FAA.13@76.835,79.375 TT1_U_FAA.13 92.456,63.627 v1(92.456,59.563)
NetC8_U_FAA_1_1: C8_U_FAA_1.1 R19_U_FAA_1.1 R21_U_FAA_1.1 R25_U_FAA_1.2 R27_U_FAA_1.2 TT1_U_FAA_1.13 | length 94.8
  Top Layer w0.7: v1(13.335,58.42) 13.462,58.547 R25_U_FAA_1.2 19.273,60.833 21.305,60.833 22.194,59.944 R27_U_FAA_1.2 38.069,58.928 40.101,60.96 40.101,68.611 ; 35.021,84.836 R19_U_FAA_1.1 37.434,82.423 40.101,79.756 40.101,68.611 ; R21_U_FAA_1.1 47.498,66.802 C8_U_FAA_1.1 41.91,66.802 40.101,68.611
  Bottom Layer w0.7: v1(13.335,58.42) 13.335,54.96 TT1_U_FAA_1.13
NetC8_U_FAA_1_2: C8_U_FAA_1.2 R22_U_FAA_1.2 R28_U_FAA_1.1 TT1_U_FAA_1.14 | length 54.9
  Top Layer w0.7: v1(43.18,69.342) 45.974,69.342 C8_U_FAA_1.2 46.228,71.882 R28_U_FAA_1.1
  Bottom Layer w0.7: TT1_U_FAA_1.14 35.784,41.911 35.784,51.864 38.561,54.641 46.767,54.641 48.641,56.515 R22_U_FAA_1.2 47.751,60.199 47.751,61.342 43.18,65.913 v1(43.18,69.342)
NetC8_U_FAA_2: C8_U_FAA.2 R22_U_FAA.2 R28_U_FAA.1 TT1_U_FAA.14 | length 48.6
  Top Layer w0.7: C8_U_FAA.2 59.182,49.53 R28_U_FAA.1 62.723,50.404 62.723,52.055 v1(62.865,52.197) ; TT1_U_FAA.14@76.835,81.661 TT1_U_FAA.14
  Bottom Layer w0.7: v1(62.865,52.197) 62.865,55.88 60.071,58.674 R22_U_FAA.2 60.071,63.377 61.083,64.389 69.389,64.389 70.865,65.865 70.865,75.818 TT1_U_FAA.14
NetCcv1_1: Ccv1.1 U3.5 | length 3.7
  Bottom Layer w0.7: Ccv1.1 81.026,16.002 U3.5
NetCf1_1: Cf1.1 Jsierra1.2 R35.1 T1.2 U3.2 U3.6 | length 35
  Bottom Layer w0.7: Cf1.1 66.929,21.336 Jsierra1.2 67.437,21.336 U3.2 76.2,18.796 U3.6 84.074,18.796 R35.1 84.328,11.938 80.899,8.509 T1.2
NetCh1_1: Ch1.1 U2.6 | length 2.9
  Bottom Layer w0.7: Ch1.1@33.528,16.129 U2.6
NetD1_2: D1.2 D2.1 | length 4.4
  Bottom Layer w0.7: D2.1 57.15,16.383 D1.2
NetD2_2: D2.2 Rd1.2 T1.1 | length 26.1
  Bottom Layer w0.7: Rd1.2 55.753,4.826 D2.2 57.531,3.81 75.692,3.81 T1.1
NetR3_U_FAA_1_2: R3_U_FAA_1.2 R4_U_FAA_1.1 | length 4.1
  Top Layer w0.7: R3_U_FAA_1.2 20.934,28.448 22.331,27.051 R4_U_FAA_1.1
NetR3_U_FAA_2: R3_U_FAA.2 R4_U_FAA.1 | length 4.4
  Top Layer w0.7: R4_U_FAA.1 83.185,91.567 R3_U_FAA.2 R3_U_FAA.2@85.74,91.328
NetR5_U_FAA_1_2: R5_U_FAA_1.2 R6_U_FAA_1.1 | length 4.9
  Top Layer w0.7: R5_U_FAA_1.2 20.797,33.401 20.797,37.688 R6_U_FAA_1.1
NetR5_U_FAA_2: R5_U_FAA.2 R6_U_FAA.1 | length 3
  Top Layer w0.7: R5_U_FAA.2 85.852,84.328 R6_U_FAA.1
NetR9_U_FAA_1_2: R9_U_FAA_1.2 R12_U_FAA_1.2 TT1_U_FAA_1.2 | length 14.5
  Top Layer w0.7: v1(41.879,33.909) 41.498,33.528 R9_U_FAA_1.2 R12_U_FAA_1.2
  Bottom Layer w0.7: TT1_U_FAA_1.2 40.148,38.481 41.879,36.75 v1(41.879,33.909)
NetR9_U_FAA_2: R9_U_FAA.2 R12_U_FAA.2 TT1_U_FAA.2 | length 14.5
  Top Layer w0.7: R12_U_FAA.2 R9_U_FAA.2 65.151,84.201 v1(64.77,83.82)
  Bottom Layer w0.7: v1(64.77,83.82) 64.77,80.979 66.501,79.248 TT1_U_FAA.2
NetR10_U_FAA_1: R10_U_FAA.1 R11_U_FAA.1 | length 3.8
  Top Layer w0.7: R10_U_FAA.1 50.927,70.485 R11_U_FAA.1
NetR10_U_FAA_1_1: R10_U_FAA_1.1 R11_U_FAA_1.1 | length 3.8
  Top Layer w0.7: R11_U_FAA_1.1 55.722,47.244 R10_U_FAA_1.1
NetR10_U_FAA_1_2: R10_U_FAA_1.2 R13_U_FAA_1.2 TT1_U_FAA_1.6 | length 28.5
  Top Layer w0.7: v1(52.801,41.91) R10_U_FAA_1.2 55.468,41.656 R13_U_FAA_1.2
  Bottom Layer w0.7: TT1_U_FAA_1.6 v1@42.26,48.641 ; v1(42.641,48.387) 42.514,48.26 42.514,43.815 44.419,41.91 v1(52.801,41.91)
NetR10_U_FAA_2: R10_U_FAA.2 R13_U_FAA.2 TT1_U_FAA.6 | length 28.5
  Top Layer w0.7: R13_U_FAA.2 51.181,76.073 R10_U_FAA.2 v1(53.848,75.819)
  Bottom Layer w0.7: v1(53.848,75.819) 62.23,75.819 64.135,73.914 64.135,69.469 v1(64.008,69.342) ; v1@64.389,69.088 TT1_U_FAA.6
NetR16_U_FAA_1: R16_U_FAA.1 R17_U_FAA.2 | length 5
  Top Layer w0.7: R16_U_FAA.1 90.551,68.453 R17_U_FAA.2
NetR16_U_FAA_1_1: R16_U_FAA_1.1 R17_U_FAA_1.2 | length 5
  Top Layer w0.7: R17_U_FAA_1.2 16.098,49.276 R16_U_FAA_1.1
NetR16_U_FAA_1_2: R16_U_FAA_1.2 R18_U_FAA_1.2 TT1_U_FAA_1.9 | length 20.1
  Top Layer w0.7: R18_U_FAA_1.2@13.939,42.778 15.738,44.577 17.939,44.577 18.653,45.291 18.653,47.259 R16_U_FAA_1.2 20.035,48.641 v1(25.623,48.641) v1@26.274,48.641
  Bottom Layer w0.7: v1(25.623,48.641) TT1_U_FAA_1.9
NetR16_U_FAA_2: R16_U_FAA.2 R18_U_FAA.2 TT1_U_FAA.9 | length 20.2
  Top Layer w0.7: v1@80.375,69.088 v1(81.026,69.088) 86.614,69.088 R16_U_FAA.2 87.996,70.47 87.996,72.438 88.71,73.152 90.911,73.152 92.71,74.951 R18_U_FAA.2
  Bottom Layer w0.7: TT1_U_FAA.9 v1(81.026,69.088)
NetR19_U_FAA_1_2: R19_U_FAA_1.2 R23_U_FAA_1.2 R30_U_FAA_1.1 TT2_U_FAA_1.7 | length 42.8
  Top Layer w0.7: v1@20.193,80.518 20.193,76.677 R30_U_FAA_1.1 ; v1(23.876,81.153) 27.94,81.153 29.004,80.089 ; R23_U_FAA_1.2 24.861,77.978 25.242,78.359 v1(27.274,78.359) 29.004,80.089 ; 32.735,84.836 R19_U_FAA_1.2 31.338,82.423 29.004,80.089
  Bottom Layer w0.7: v1(20.193,81.026) 22.987,81.026 v1@23.114,81.153 ; v1(27.274,78.359) 27.608,78.359 29.894,80.645 34.767,80.645 TT2_U_FAA_1.7
NetR19_U_FAA_2: R19_U_FAA.2 R23_U_FAA.2 R30_U_FAA.1 TT2_U_FAA.7 | length 39.2
  Top Layer w0.7: R19_U_FAA.2 75.311,35.306 v1(79.375,39.37) ; v1(82.55,37.592) 81.153,37.592 v1(79.375,39.37) ; R23_U_FAA.2 81.788,39.751 81.407,39.37 v1(79.375,39.37) ; R30_U_FAA.1 86.995,40.513 v1@86.995,37.846
  Bottom Layer w0.7: TT2_U_FAA.7 69.723,39.37 69.723,38.862 70.484,38.101 77.645,38.101 78.914,39.37 v1(79.375,39.37) ; v1@82.677,37.592 v1(86.995,37.592)
NetR21_U_FAA_1_2: R21_U_FAA_1.2 R22_U_FAA_1.3 | length 9.9
  Top Layer w0.7: R21_U_FAA_1.2 51.689,64.897 v1(54.483,64.897)
  Bottom Layer w0.7: R22_U_FAA_1.3 54.483,62.611 v1(54.483,64.897)
NetR21_U_FAA_2: R21_U_FAA.2 R22_U_FAA.3 | length 9.2
  Top Layer w0.7: v1(55.245,54.737) 55.626,54.356 R21_U_FAA.2
  Bottom Layer w0.7: v1@55.245,54.991 55.245,56.896 R22_U_FAA.3
NetR23_U_FAA_1: R23_U_FAA.1 R29_U_FAA.2 TT2_U_FAA.6 | length 42.8
  Top Layer w0.7: v1(64.516,40.894) 64.262,40.64 R29_U_FAA.2 67.945,31.369 81.026,31.369 84.709,35.052 84.709,40.005 84.688,40.005 82.656,42.037 R23_U_FAA.1
  Bottom Layer w0.7: v1(64.516,40.894) 67.945,40.894 TT2_U_FAA.6
NetR23_U_FAA_1_1: R23_U_FAA_1.1 R29_U_FAA_1.2 TT2_U_FAA_1.6 | length 74.7
  Top Layer w0.7: v1(27.274,75.692) R23_U_FAA_1.1 23.972,75.692 21.94,77.724 21.94,82.677 25.623,86.36 38.704,86.36 R29_U_FAA_1.2
  Bottom Layer w0.7: v1(27.274,75.692) 25.273,73.691 25.273,62.406 28.116,59.563 31.75,59.563 32.766,60.579 32.766,71.024 TT2_U_FAA_1.6
NetR24_U_FAA_1: R24_U_FAA.1 R30_U_FAA.2 TT2_U_FAA.9 | length 12.7
  Top Layer w0.7: v1(79.629,44.704) 82.169,47.244 R30_U_FAA.2 R24_U_FAA.1
  Bottom Layer w0.7: TT2_U_FAA.9 77.216,42.291 v1(79.629,44.704)
NetR24_U_FAA_1_1: R24_U_FAA_1.1 R30_U_FAA_1.2 TT2_U_FAA_1.9 | length 19.6
  Top Layer w0.7: R30_U_FAA_1.2 R24_U_FAA_1.1 27.147,65.405 v1(27.274,65.278)
  Bottom Layer w0.7: v1(27.274,65.278) 27.274,73.152 TT2_U_FAA_1.9
NetR33_1: R33.1 R34.2 U2.8 | length 36.4
  Top Layer w0.7: v1@16.891,18.923 21.209,18.923 24.13,21.844 v1(27.94,21.844)
  Bottom Layer w0.7: R33.1 8.382,11.79 10.943,14.351 R34.2 13.843,16.129 v1(16.637,18.923) ; v1(27.94,21.844) 35.814,21.844 U2.8
NetR35_2: R35.2 U3.7 | length 3
  Bottom Layer w0.7: U3.7 R35.2
NetR36_1: R36.1 R37.1 U4.2 | length 12.2
  Bottom Layer w0.7: R37.1 49.53,18.413 50.928,19.811 51.307,19.811 U4.2 53.086,20.701 R36.1
NetR37_2: R37.2 R38.1 | length 4.8
  Bottom Layer w0.7: R37.2 47.244,12.446 R38.1
NetRf1_2: Rf1.2 Rp1.3 | length 4.3
  Bottom Layer w0.7: Rf1.2@36.703,6.477 40.259,6.477 Rp1.3
NetRf2_1: Rf2.1 Rf4.1 | length 4.7
  Bottom Layer w0.7: Rf4.1 64.262,14.478 Rf2.1
NetRf3_2: Rf3.2 T1.3 | length 7.3
  Bottom Layer w0.7: Rf3.2@68.707,8.763 69.469,9.525 72.39,9.525 73.406,8.509 T1.3
NetRf3_3: Rf3.3 Rf4.2 | length 8
  Bottom Layer w0.7: Rf4.2 66.294,9.398 Rf3.3
NetRp1_2: Rp1.2 U2.2 | length 23.8
  Bottom Layer w0.7: U2.2 36.068,25.273 40.258,21.083 40.258,17.421 40.803,16.876 41.671,16.876 43.434,15.113 43.434,9.525 42.418,8.509 Rp1.2
Output: J3.2 Output1.2 | length 32.1
  Bottom Layer w0.7: J3.2 7.326,71.755 Output1.2
Output1: J4.1 U2.5 | length 94.8
  Bottom Layer w0.7: U2.5 27.559,19.05 26.035,20.574 26.035,26.59 30.305,30.86 49.783,30.86 53.594,34.671 71.12,34.671 77.089,28.702 85.852,28.702 88.154,31.004 88.154,33.942 90.407,36.195 92.456,36.195 94.615,38.354 J4.1
Output2: J2.1 R32.2 U1.10 | length 48.8
  Top Layer w0.7: v1@22.225,17.145 v1(26.924,17.145)
  Bottom Layer w0.7: J2.1 5.08,24.13 8.255,20.955 17.78,20.955 19.177,19.558 R32.2 ; R32.2@19.812,16.51 21.061,16.51 21.569,17.018 v1(22.225,17.018) ; v1(26.924,17.145) 26.924,17.081 U1.10 U1.10@27.178,12.065
Sawtooth: Jsierra1.1 U4.3 | length 26.1
  Bottom Layer w0.7: U4.3 54.102,25.146 54.102,30.115 55.118,31.131 55.229,31.131 55.245,31.115 60.325,31.115 62.357,29.083 62.357,23.368 Jsierra1.1
Vcc+_U_FAA: Ccoup1.1 Ccoup2.1 Ccoup3.1 D1.1 R33.2 R36.2 Rf2.2 Rp1.1 Rup1.2 TT1_U_FAA.4 TT1_U_FAA_1.4 TT2_U_FAA.4 TT2_U_FAA_1.4 U1.14 U2.1 U3.4 U3.8 U4.8 Vcc1.3 | length 31.8
  Bottom Layer w0.7: R33.2 13.716,11.684 16.383,11.684 16.51,11.811 16.637,11.684 U1.14 ; U2.1 U2.1@38.608,27.178 ; Rup1.2 41.91,18.161 U4.8 ; R36.2 56.642,26.543 D1.1 ; Rf2.2 73.025,15.621 U3.4 U3.4@73.279,16.256 ; U3.8 U3.8@81.407,24.003 ; Ccoup2.1@91.44,4.445 91.44,6.858 91.821,7.239 ; Ccoup1.1 Ccoup2.1 ; 91.948,7.366 93.599,9.017 Vcc1.3
Vcc-_U_FAA: Ccoup4.1 Ccoup5.1 Ccoup6.1 TT1_U_FAA.11 TT1_U_FAA_1.11 TT2_U_FAA.11 TT2_U_FAA_1.11 U1.7 U2.4 Vcc1.1 | length 12.9
  Bottom Layer w0.7: Ccoup6.1@91.694,33.147 Ccoup6.1 Ccoup5.1 91.567,29.591 91.44,29.464 91.44,27.051 93.599,24.892 Vcc1.1 93.519,21.971 Vcc1.1@93.138,21.59
Vi(0.55)_U_FAA: Input1.2 J1.3 R3_U_FAA.1 | length 47.5
  Top Layer w0.7: v1@81.28,93.98 R3_U_FAA.1@85.979,93.98
  Bottom Layer w0.7: 76.454,93.98 91.694,93.98 95.25,90.424 J1.3 ; 76.541,94.107 v1(81.407,94.107)
Vi(0.55)_U_FAA_1: J2.2 J3.3 R3_U_FAA_1.1 | length 69.9
  Top Layer w0.7: v1(20.701,22.86) 20.701,26.035 R3_U_FAA_1.1
  Bottom Layer w0.7: J3.3 2.54,71.247 2.54,45.974 J2.2 5.97,42.544 6.349,42.544 7.112,41.781 7.112,26.416 6.985,26.289 10.414,22.86 v1(20.701,22.86)
Vi(0.94)_U_FAA: C2_U_FAA.2 R1_U_FAA.1 R7_U_FAA.1 R9_U_FAA.1 TT1_U_FAA.1 | length 32.1
  Top Layer w0.7: R1_U_FAA.1 R7_U_FAA.1 65.913,81.153 v1(66.421,81.661) 66.548,81.661 68.961,84.074 ; R9_U_FAA.1 67.437,85.598 68.961,84.074 ; C2_U_FAA.2 82.063,81.915 79.904,84.074 68.961,84.074
  Bottom Layer w0.7: v1(66.421,81.661) 69.088,81.661 TT1_U_FAA.1
Vi(0.94)_U_FAA_1: C2_U_FAA_1.2 R1_U_FAA_1.1 R7_U_FAA_1.1 R9_U_FAA_1.1 TT1_U_FAA_1.1 | length 32.1
  Top Layer w0.7: C2_U_FAA_1.2 24.586,35.814 26.745,33.655 37.688,33.655 ; R9_U_FAA_1.1 39.212,32.131 37.688,33.655 ; R1_U_FAA_1.1 R7_U_FAA_1.1 40.736,36.576 v1(40.228,36.068) 40.101,36.068 37.688,33.655
  Bottom Layer w0.7: TT1_U_FAA_1.1 37.561,36.068 v1(40.228,36.068)
Vi(1.99)_U_FAA: C1_U_FAA.2 R11_U_FAA.2 R14_U_FAA.1 TT1_U_FAA.7 | length 40.2
  Top Layer w0.7: v1(53.848,72.263) 53.848,70.104 R11_U_FAA.2 54.102,69.977 61.595,62.484 R14_U_FAA.1 ; C1_U_FAA.2 v1(61.151,68.644) 63.373,66.421 v1(65.913,66.421)
  Bottom Layer w0.7: v1@54.102,72.263 57.531,72.263 v1(61.151,68.644) ; 67.056,66.548 TT1_U_FAA.7
Vi(1.99)_U_FAA_1: C1_U_FAA_1.2 R11_U_FAA_1.2 R14_U_FAA_1.1 TT1_U_FAA_1.7 | length 40.2
  Top Layer w0.7: R14_U_FAA_1.1 45.054,55.245 52.547,47.752 R11_U_FAA_1.2 52.801,47.625 v1(52.801,45.466) ; v1(40.736,51.308) 43.276,51.308 v1(45.498,49.085) C1_U_FAA_1.2
  Bottom Layer w0.7: TT1_U_FAA_1.7 39.593,51.181 ; v1(45.498,49.085) 49.118,45.466 v1@52.547,45.466
Vi(TT)_U_FAA: C5_U_FAA.2 R17_U_FAA.1 R25_U_FAA.1 R27_U_FAA.1 TT1_U_FAA.8 | length 23.3
  Top Layer w0.7: v1(82.55,66.548) 84.074,65.024 ; R27_U_FAA.1 86.741,61.595 C5_U_FAA.2 ; R17_U_FAA.1 84.074,65.024 ; R25_U_FAA.1@89.662,61.722 89.027,62.357 C5_U_FAA.2 ; 84.074,65.024 85.979,63.119 C5_U_FAA.2
  Bottom Layer w0.7: TT1_U_FAA.8 v1(82.55,66.548)
Vi(TT)_U_FAA_1: C5_U_FAA_1.2 R17_U_FAA_1.1 R25_U_FAA_1.1 R27_U_FAA_1.1 TT1_U_FAA_1.8 | length 23.3
  Top Layer w0.7: R25_U_FAA_1.1@16.987,56.007 17.622,55.372 C5_U_FAA_1.2 ; R17_U_FAA_1.1 22.575,52.705 ; R27_U_FAA_1.1 19.908,56.134 C5_U_FAA_1.2 ; v1(24.099,51.181) 22.575,52.705 ; C5_U_FAA_1.2 20.67,54.61 22.575,52.705
  Bottom Layer w0.7: v1(24.099,51.181) TT1_U_FAA_1.8
Vo(TT)_U_FAA: J1.1 R24_U_FAA.2 TT2_U_FAA.8 | length 47.6
  Top Layer w0.7: v1(79.502,54.864) 79.756,54.61 R24_U_FAA.2 ; J1.1@94.869,67.31 J1.1
  Bottom Layer w0.7: TT2_U_FAA.8 77.423,39.751 78.313,40.641 81.279,43.607 81.279,45.387 79.502,47.164 v1(79.502,54.864) 90.805,54.864 95.123,59.182 95.123,67.564 J1.1
Vo(TT)_U_FAA_1: J3.1 R24_U_FAA_1.2 TT2_U_FAA_1.8 | length 49.4
  Top Layer w0.7: v1(5.588,63.246) 5.715,63.119 R24_U_FAA_1.2 v1@26.893,63.119
  Bottom Layer w0.7: v1@5.461,63.373 5.588,63.5 J3.1 ; v1(27.147,62.865) 27.354,62.865 29.004,61.215 30.37,61.215 31.623,62.468 31.623,76.169 TT2_U_FAA_1.8
pads on no net: R22_U_FAA.1 R22_U_FAA_1.1 R38.3 Rf3.1 Rf4.3 U3.3 U4.5 U4.6
copper on no net: | length 0.9
  Bottom Layer w0.7: 41.148,96.139 42.037,96.139

## Polygon pours and split planes (outlines as drawn)
no net on Top Layer (solid, pour order 0): 0,0 100,0 100,100 0,100
no net on Bottom Layer (solid, pour order 2): 0,100 100,100 100,0 0,0
GND on GND-TOP (split plane): 99.49,0.51 0.51,0.51 0.51,99.49 99.49,99.49
Vcc+_U_FAA on VCC+ (split plane): 99.49,0.51 0.51,0.51 0.51,99.49 99.49,99.49
Vcc-_U_FAA on VCC- (split plane): 99.49,0.51 0.51,0.51 0.51,99.49 99.49,99.49
GND on GND-BOT (split plane): 99.49,0.51 0.51,0.51 0.51,99.49 99.49,99.49

## Silkscreen, mask and mechanical layers (free items; w line width, h text height)
Top Overlay:
  text "ASSD - TP1" at 40.64,94.996 h1.52
  text "Grupo 4" at 42.672,92.202 h1.52